# Altium PCB DDC112_TestBoard_v26.1b.PcbDoc (part 1 of 2)
Units mm, origin at the board's own origin, x right, y up, seen from the top; angles counter-clockwise.
Board outline 74 x 56 mm, 4 copper layers (Top Layer, Layer 1, Layer 2, Bottom Layer), stack 1.675 mm thick; 66 components, 60 nets, 244 pads, 541 vias.
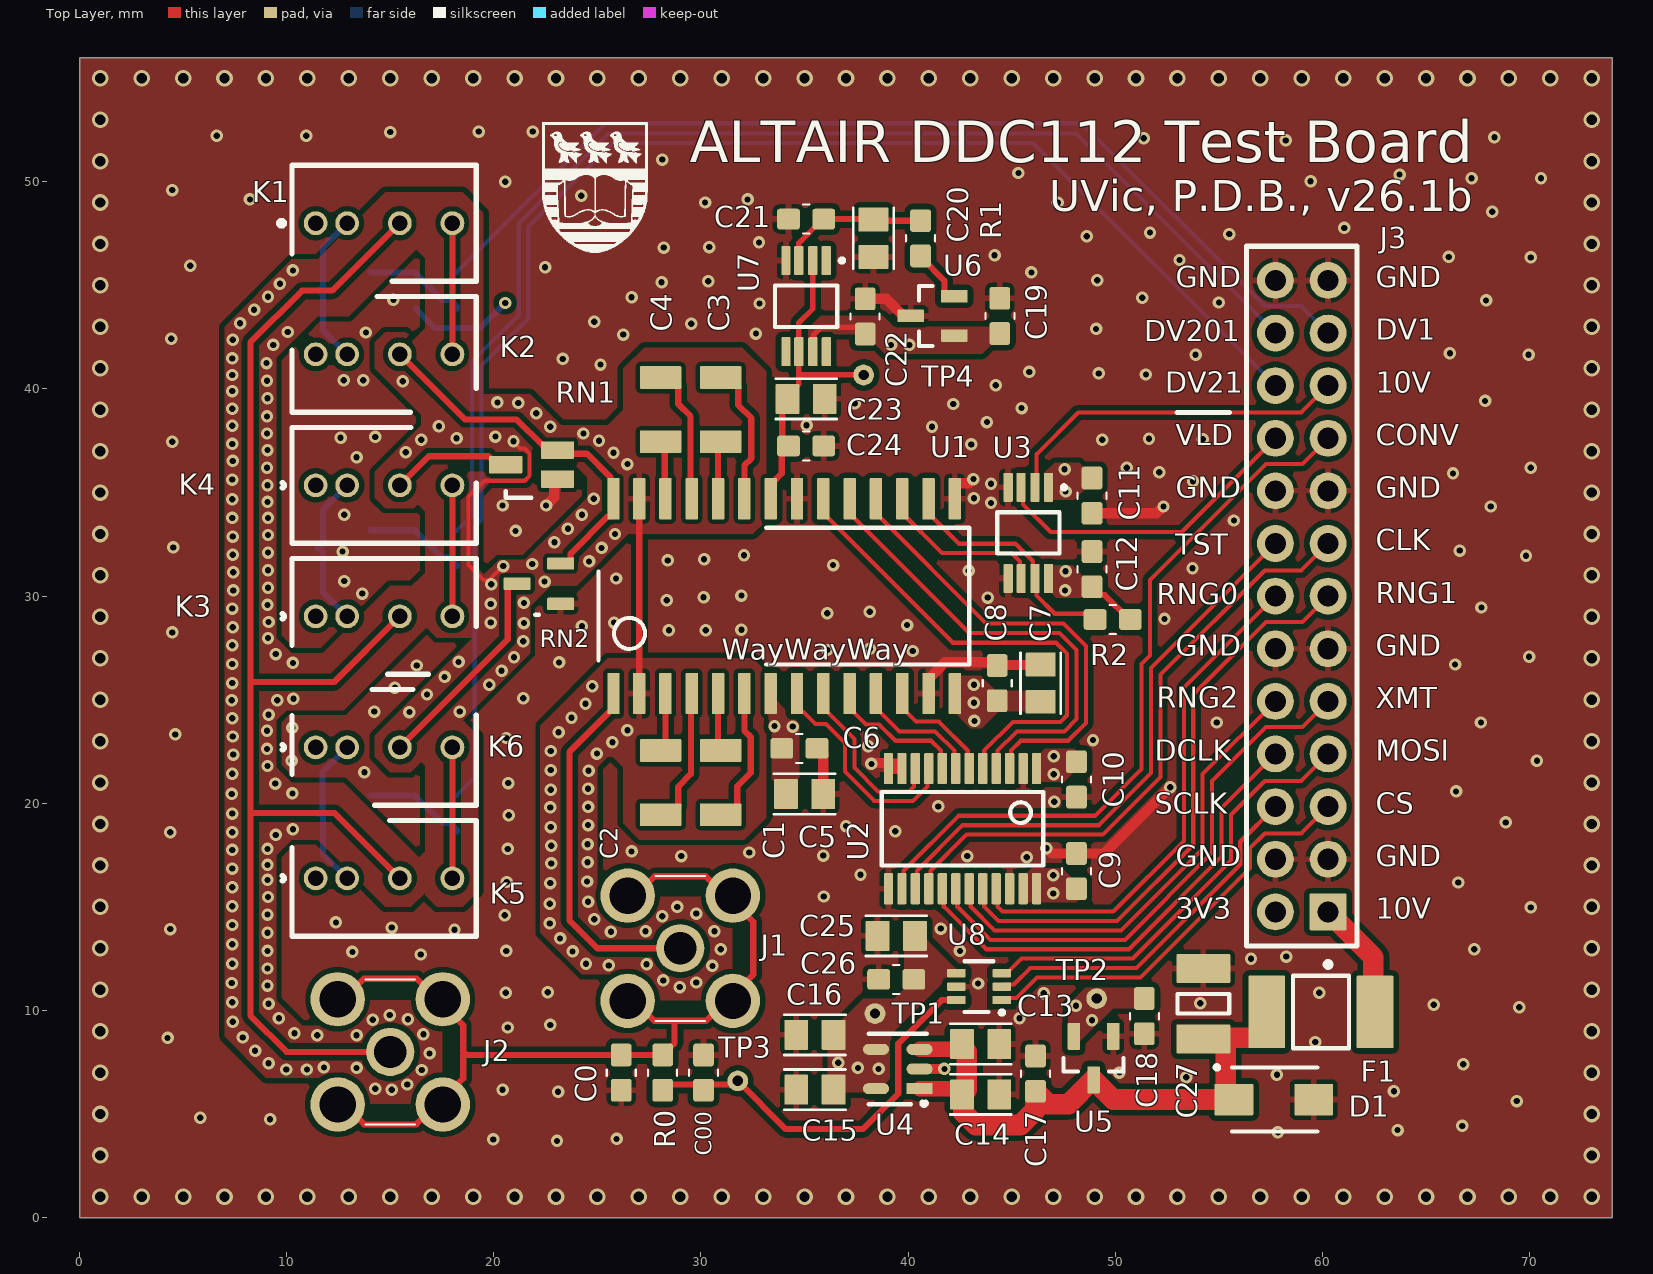
[diagram p0: Top Layer view]
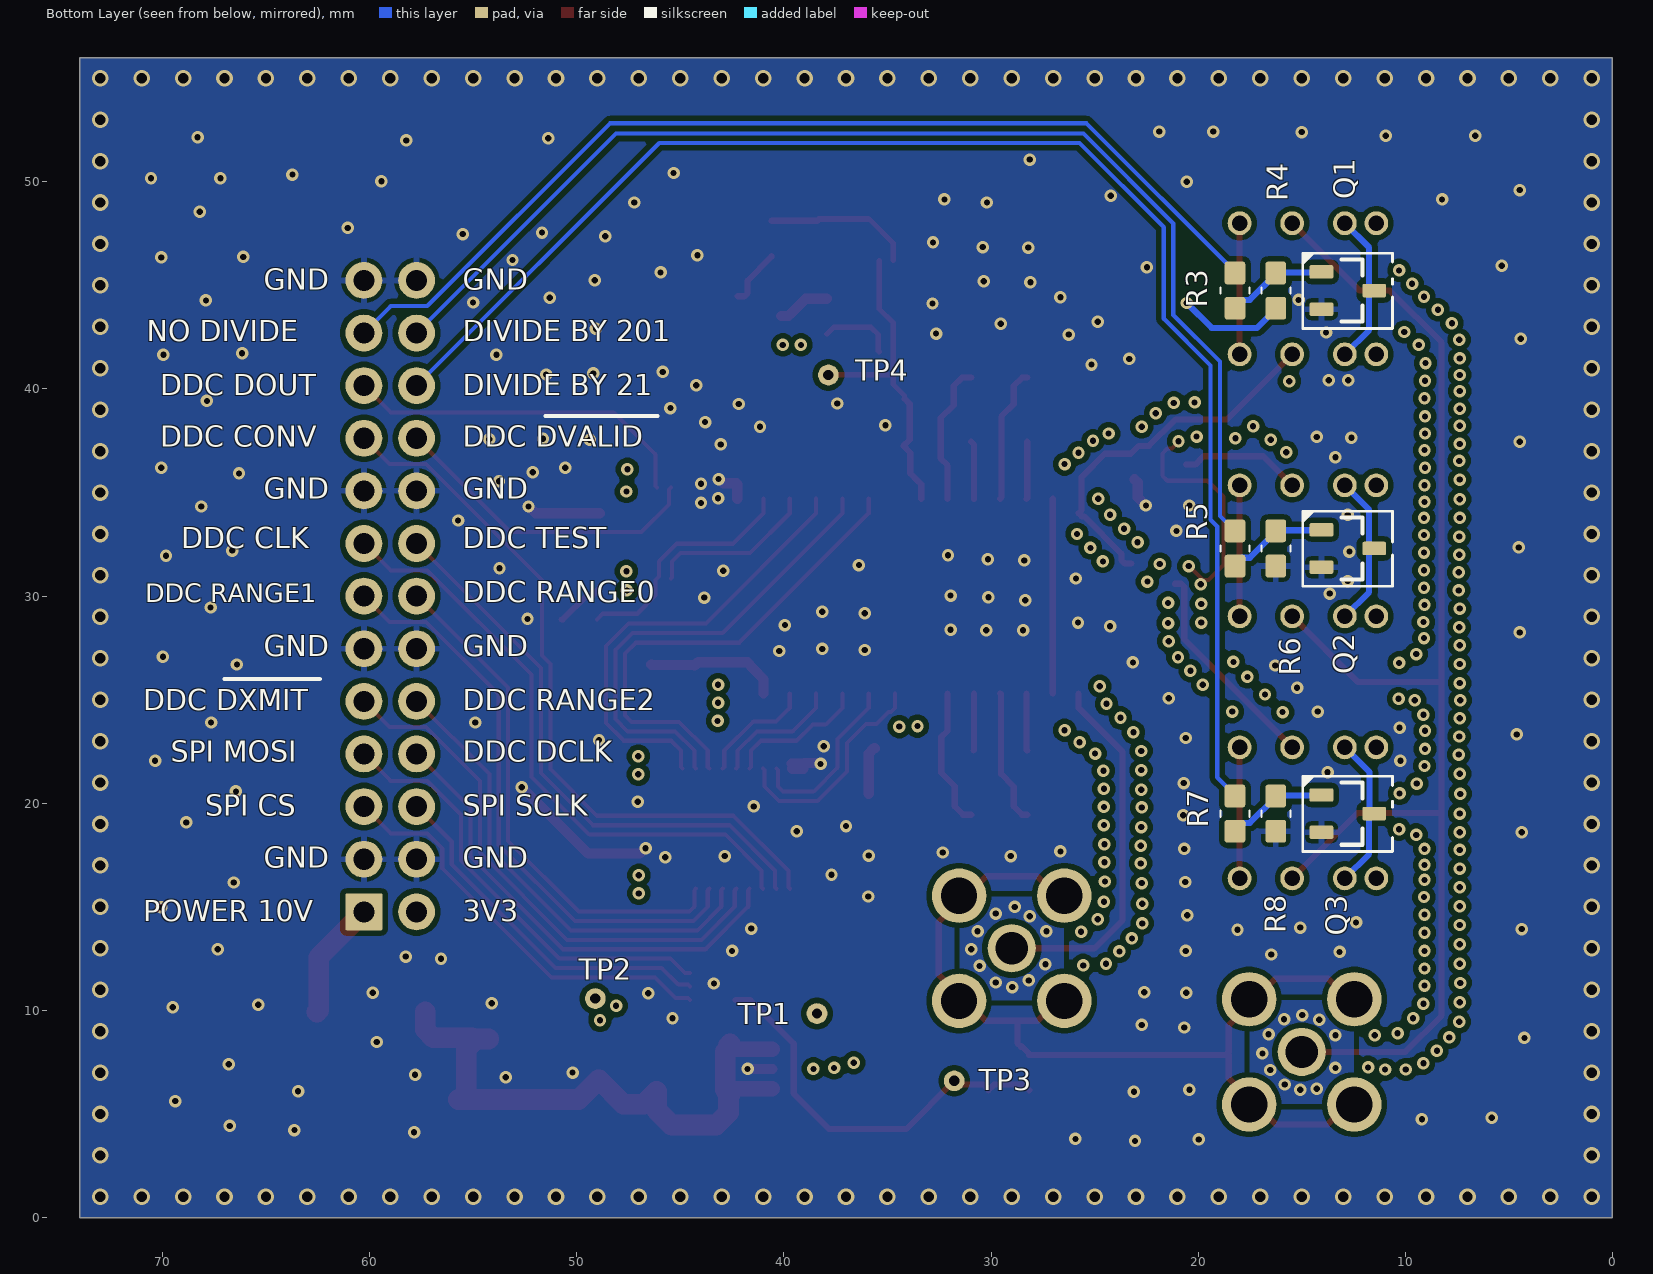
[diagram p1: Bottom Layer view, seen from below]
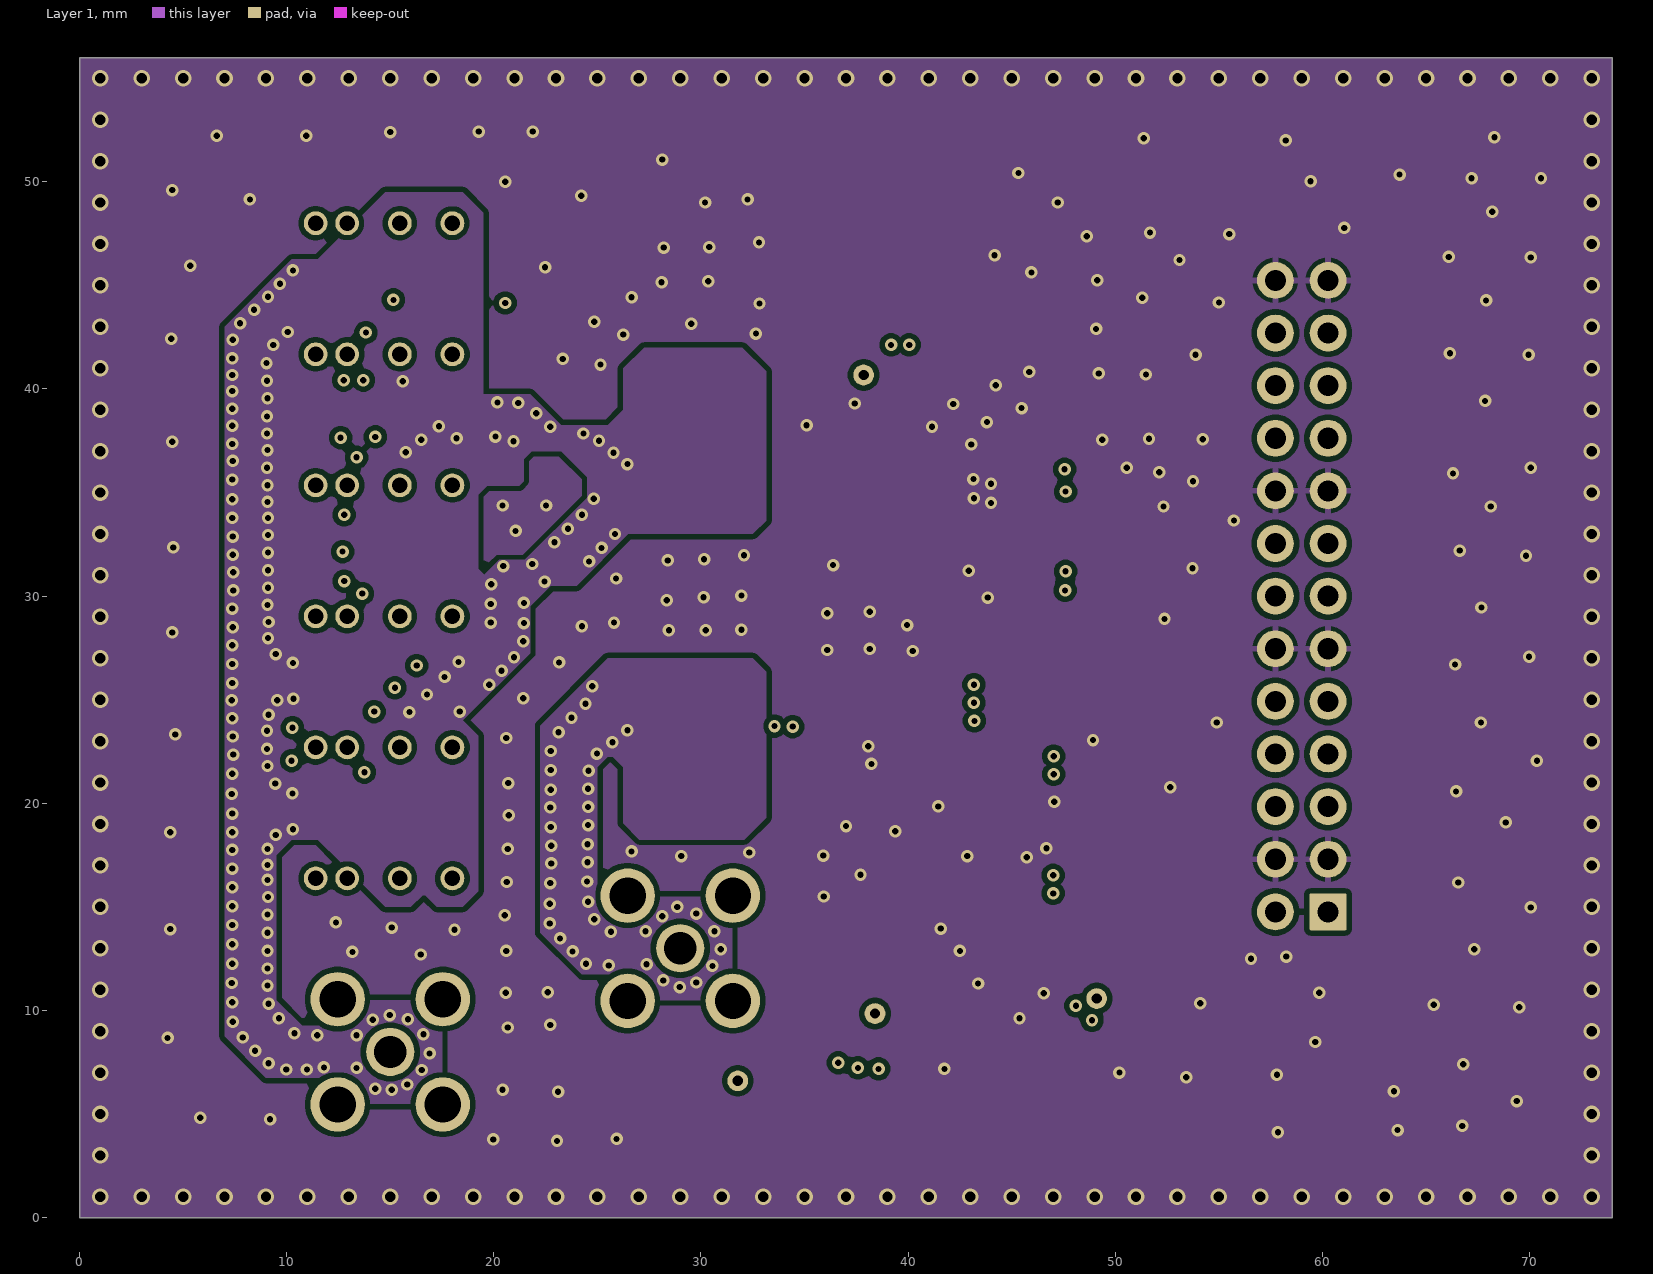
[diagram p2: Layer 1]
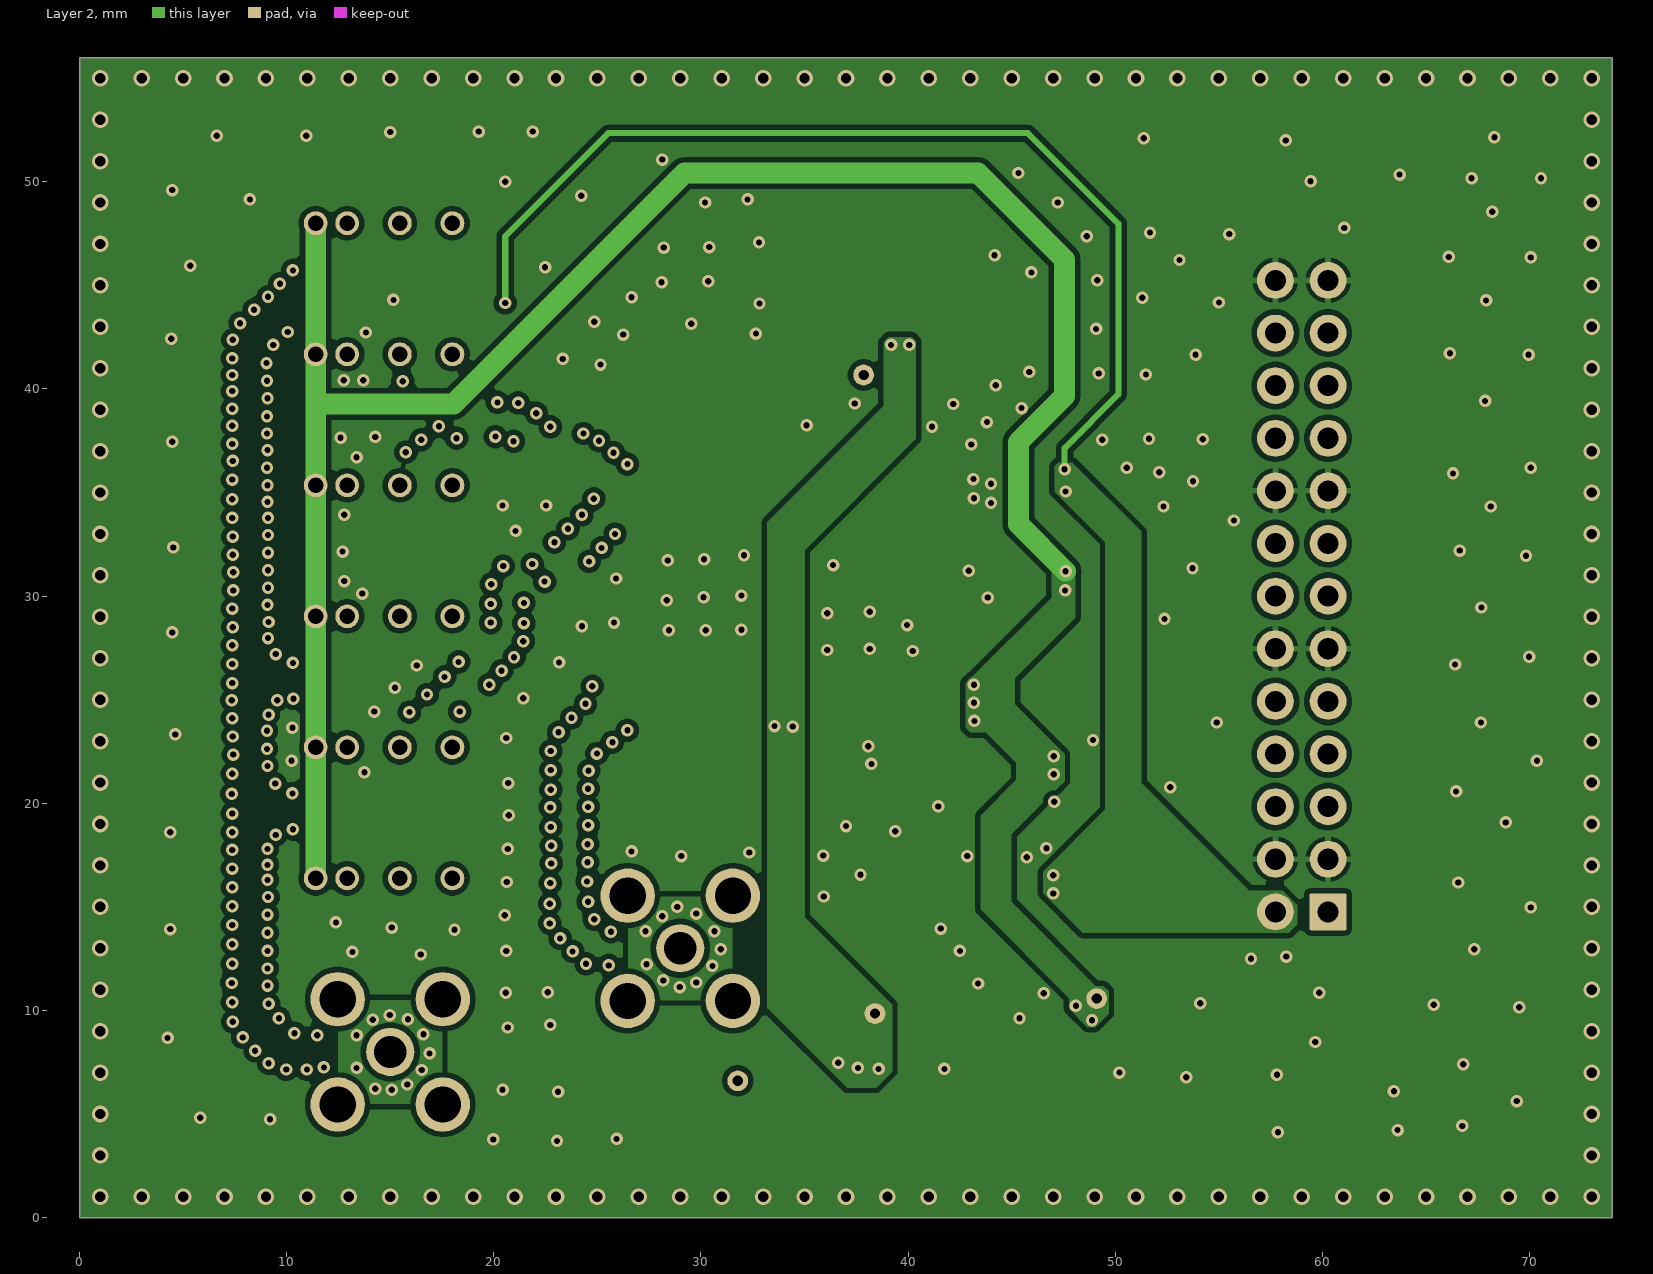
[diagram p3: Layer 2]
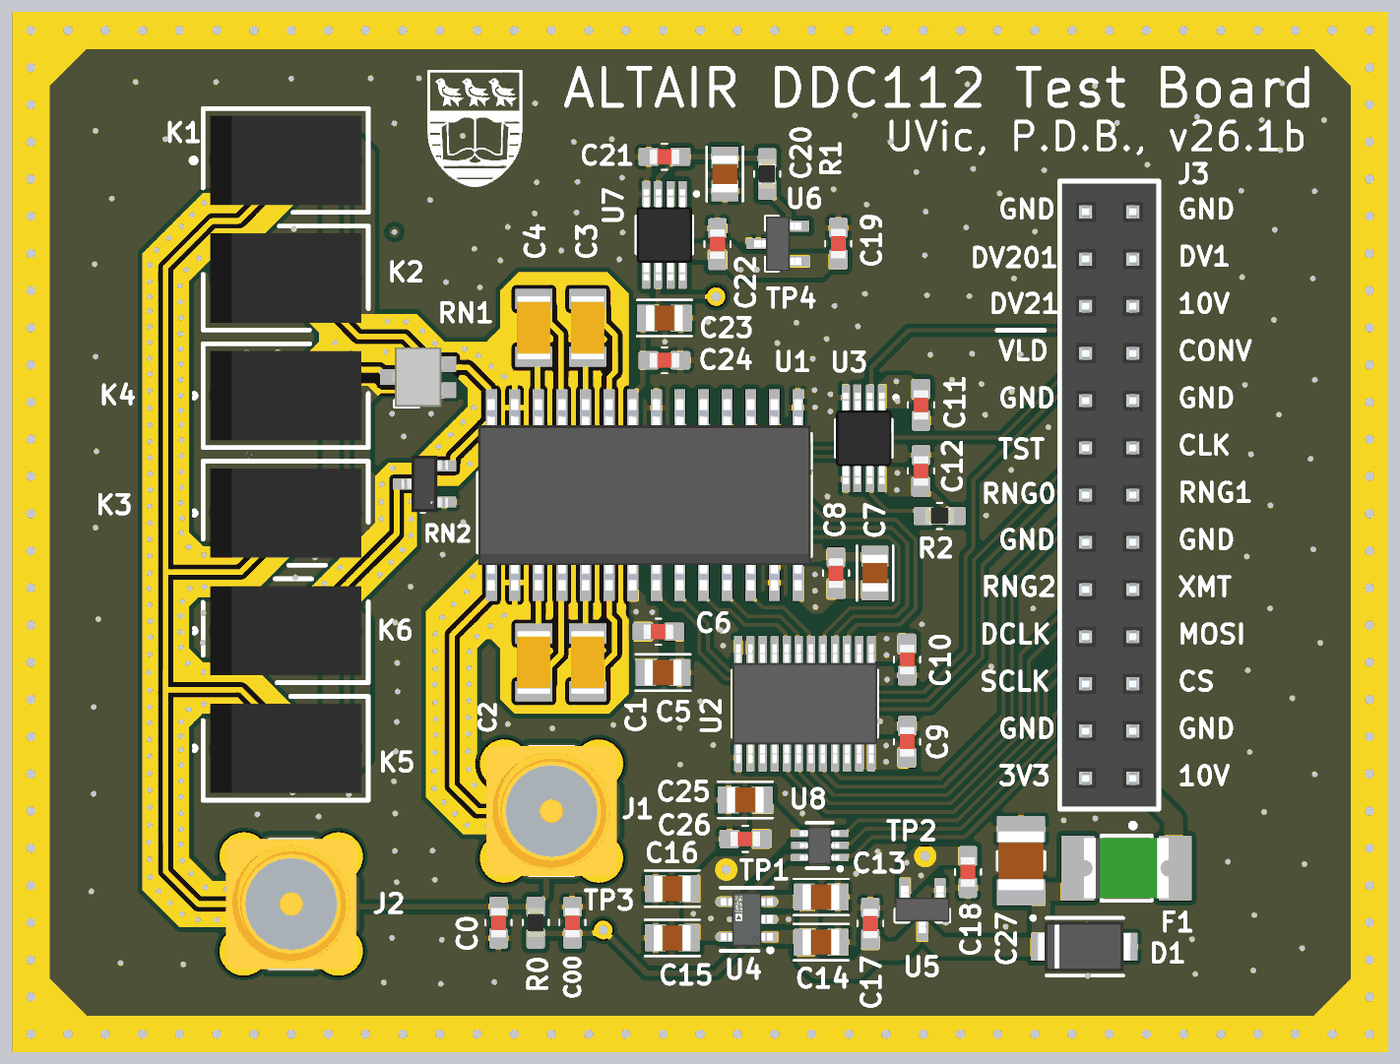
[diagram p4: 3D render of the assembled board from above, using the file's embedded part models]
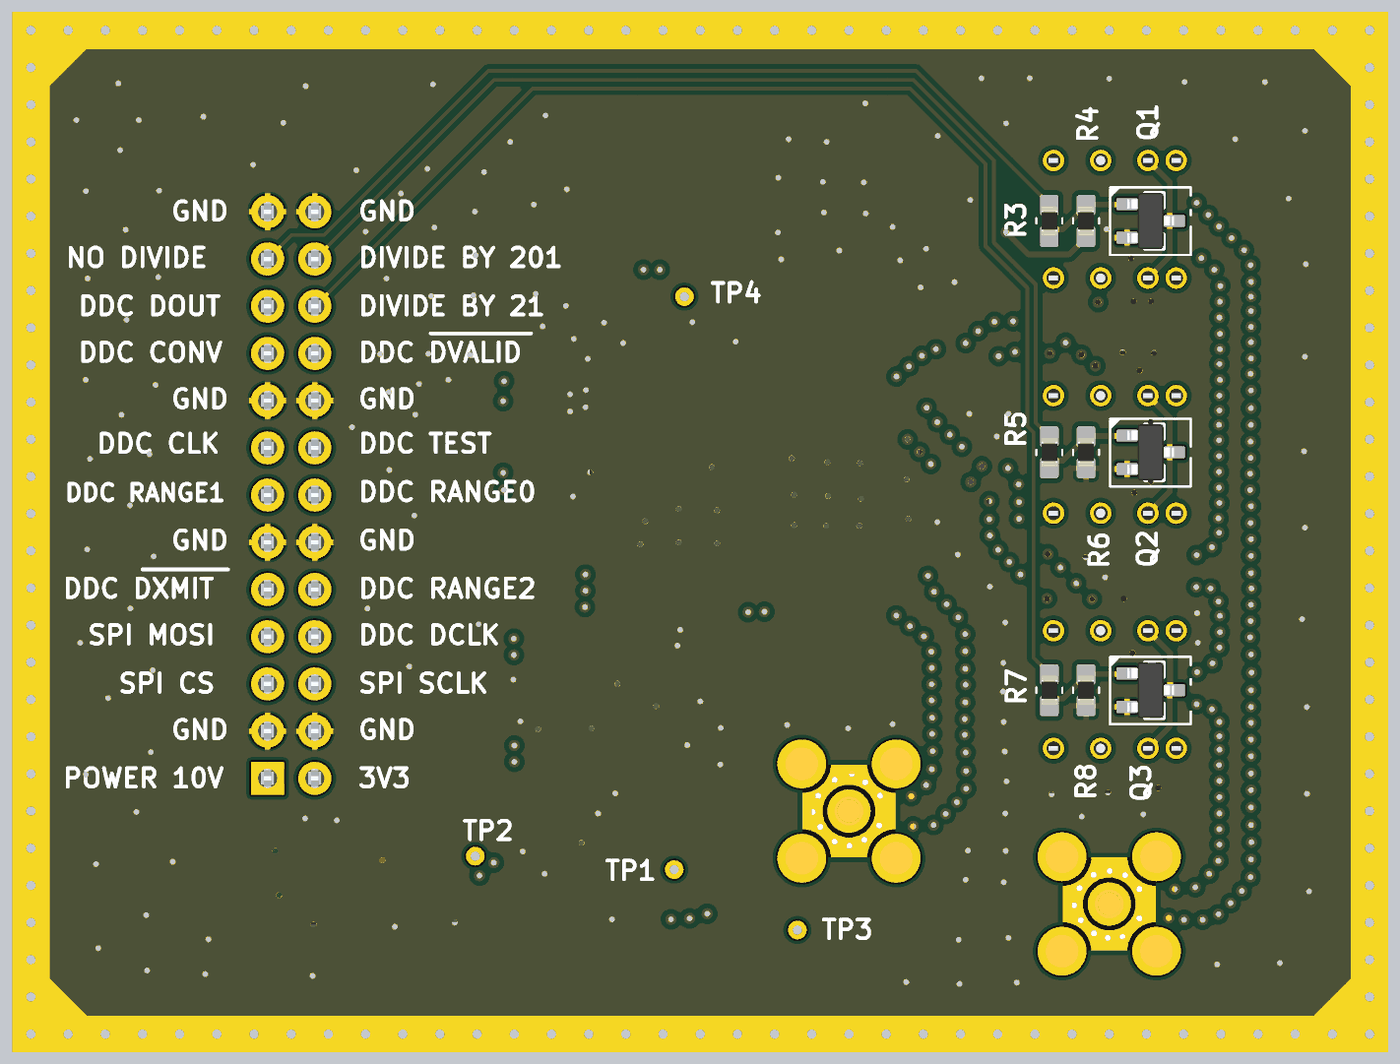
[diagram p5: 3D render of the assembled board from below, using the file's embedded part models]

## Layer stack, top to bottom
Top Solder: solder mask 0.0254, Solder Resist, Dk 3.5
Top Layer: signal copper 0.0356
Dielectric 2: prepreg 0.1702, FR-408, Dk 4.1
Layer 1: signal copper 0.035
Dielectric 1: core 1.1938, FR-408, Dk 4.8
Layer 2: signal copper 0.035
Dielectric 3: prepreg 0.1702, FR-408, Dk 4.1
Bottom Layer: signal copper 0.0356
Bottom Solder: solder mask 0.0254, Solder Resist, Dk 3.5

## Board outline
0,0 74,0 74,56 0,56

## Design rules (kind name [scope] priority, off if disabled: settings)
AssemblyTestPointUsage [All] p1: isadvanced=TRUE
AssemblyTestpoint [All] p1: isadvanced=TRUE testpointundercomponent=TRUE minsize=1.016 maxsize=2.54 preferedsize=1.524 minholesize=0 maxholesize=1.016 preferedholesize=0.813 testpointgrid=0.025 usegrid=TRUE gridtolerance=0 allowsidetop=TRUE allowsidebottom=TRUE
Clearance Clearance_GuardPoly [InPolygonClass('GuardPoly')] p1: isadvanced=TRUE gap=0.25 ignorepadtopadclearanceinfootprint=FALSE except(0: Arc-Hole Track-Hole SMDPad-Hole THPad-Hole Via-Hole Fill-Hole Poly-Hole Region-Hole Text-Hole Hole-Hole; 0.2: SMDPad-Fill SMDPad-Poly SMDPad-Region; 0.254: Arc-Arc Arc-Track Arc-SMDPad Arc-THPad Arc-Via Arc-Text Track-Track Track-SMDPad Track-THPad Track-Via Track-Text SMDPad-SMDPad SMDPad-THPad SMDPad-Via SMDPad-Text THPad-THPad THPad-Via THPad-Text Via-Via Via-Text Text-Text)
Clearance Clearance_NoViaInPad [IsVia vs IsVia or IsPad] p2: isadvanced=TRUE gap=0.254 ignorepadtopadclearanceinfootprint=FALSE except(0: Arc-Hole Track-Hole SMDPad-Hole THPad-Hole Via-Via Via-Hole Fill-Hole Poly-Hole Region-Hole Text-Hole Hole-Hole)
Clearance Clearance_DifferentNets [All] p3: isadvanced=TRUE gap=0.254 ignorepadtopadclearanceinfootprint=TRUE except(0: Arc-Hole Track-Hole SMDPad-Hole THPad-Hole Via-Hole Fill-Hole Poly-Hole Region-Hole Text-Hole Hole-Hole)
Clearance Clearance_1 [(ExistsOnLayer('Layer 1') Or ExistsOnLayer('Layer 2')) vs (ExistsOnLayer('Layer 1') Or ExistsOnLayer('Layer 2'))] p4: gap=0.254 ignorepadtopadclearanceinfootprint=FALSE sourcerule=49 cellrowname=All cellrowtype=0 cellcolname=All cellcoltype=0 innerlayers=TRUE
Clearance Clearance_2 [(ExistsOnLayer('Top Layer') Or ExistsOnLayer('Bottom Layer')) vs (ExistsOnLayer('Top Layer') Or ExistsOnLayer('Bottom Layer'))] p5: gap=0.254 ignorepadtopadclearanceinfootprint=FALSE sourcerule=49 cellrowname=All cellrowtype=0 cellcolname=All cellcoltype=0 outerlayers=TRUE
Clearance [All] p6: gap=0.254 ignorepadtopadclearanceinfootprint=FALSE ismatrix=TRUE
ComponentClearance [All] p1: isadvanced=TRUE gap=0.254 collisioncheckmode=3 verticalgap=0.254 showdistances=FALSE
FabricationTestPointUsage [All] p1: isadvanced=TRUE valid=0 allowmultiple=FALSE
FabricationTestpoint [All] p1: isadvanced=TRUE side=3 testpointundercomponent=TRUE minsize=1.016 maxsize=2.54 preferedsize=1.524 minholesize=0 maxholesize=1.016 preferedholesize=0.813 testpointgrid=0.025 allowsidetop=TRUE allowsidebottom=TRUE usegrid=TRUE gridtolerance=0
FanoutControl Fanout_BGA [IsBGA] p1: isadvanced=TRUE bgadir=Out bgaviamode=Centered fanoutstyle=Auto fanoutdirection=Alternating viagrid=0.025 // Fanout_BGA (Default Rule)
FanoutControl Fanout_LCC [IsLCC] p2: isadvanced=TRUE bgadir=Out bgaviamode=Centered fanoutstyle=Auto fanoutdirection=Alternating viagrid=0.025 // Fanout_LCC (Default Rule)
FanoutControl Fanout_SOIC [IsSOIC] p3: isadvanced=TRUE bgadir=Out bgaviamode=Centered fanoutstyle=Auto fanoutdirection=Alternating viagrid=0.025 // Fanout_SOIC (Default Rule)
FanoutControl Fanout_Small [(CompPinCount < 5)] p4: isadvanced=TRUE bgadir=Out bgaviamode=Centered fanoutstyle=Auto fanoutdirection=OutThenIn viagrid=0.025 // Fanout_Small (Default Rule)
FanoutControl Fanout_Default [All] p5: isadvanced=TRUE bgadir=Out bgaviamode=Centered fanoutstyle=Auto fanoutdirection=Alternating viagrid=0.025 // Fanout_Default (Default Rule)
Height [All] p1: isadvanced=TRUE minheight=0 maxheight=25.4 prefheight=12.7
HoleSize [All] p1: isadvanced=TRUE absolutevalues=TRUE maxlimit=4 minlimit=0.2 maxpercent=80.000 minpercent=20.000
HoleToHoleClearance [All] p1: isadvanced=TRUE gap=0.407 allowstackedmicrovias=TRUE
LayerPairs [All] p1: isadvanced=TRUE enforce=TRUE
MinimumSolderMaskSliver [All] p1: isadvanced=TRUE minsoldermaskwidth=0.076
NetAntennae [All] p1: isadvanced=TRUE netantennaetolerance=0
PasteMaskExpansion [All] p1: isadvanced=TRUE expansion=0
PlaneClearance [All] p1: isadvanced=TRUE clearance=0.508
PlaneConnect [All] p1: isadvanced=TRUE planeconnectstyle=Relief reliefexpansion=0.508 reliefentries=4 reliefconductorwidth=0.254 reliefairgap=0.254
PolygonConnect DirectConnectViasRule [InPolygonClass('DirectConnectVias')] p1: isadvanced=TRUE thpad.connectstyle=Relief thpad.reliefconductorwidth=0.3 thpad.reliefentries=4 thpad.polygonreliefangle="90 Angle" thpad.airgapwidth=0.2 smdpad.connectstyle=Relief smdpad.reliefconductorwidth=0.3 smdpad.reliefentries=4 smdpad.polygonreliefangle="90 Angle" smdpad.airgapwidth=0.2 via.connectstyle=Direct via.reliefconductorwidth=0.254 via.reliefentries=2 via.polygonreliefangle="0 Angle" via.airgapwidth=0.254
PolygonConnect DirectConnectAllRule [InPolygonClass('DirectConnectAll')] p2: isadvanced=TRUE connectstyle=Direct reliefconductorwidth=0.254 reliefentries=2 polygonreliefangle="0 Angle" airgapwidth=0.254
PolygonConnect [All] p3: connectstyle=Relief reliefconductorwidth=0.254 reliefentries=4 polygonreliefangle="90 Angle" airgapwidth=0.254
RoutingCorners [All] p1: isadvanced=TRUE cornerstyle=45-Degree minsetback=2.54 maxsetback=2.54
RoutingPriority [All] p1: isadvanced=TRUE routingpriority=0
RoutingVias RoutingViaStyle_1 [All] p1: isadvanced=TRUE holewidth=0.3 width=0.6 viastyle="Through Hole" minholewidth=0.2 minwidth=0.5 maxholewidth=2 maxwidth=1
RoutingVias [All] p2: holewidth=0.711 width=1.27 viastyle="Through Hole" minholewidth=0.711 minwidth=1.27 maxholewidth=0.711 maxwidth=1.27
ShortCircuit [All] p1: isadvanced=TRUE allowed=FALSE
SilkToSilkClearance [All] p1: isadvanced=TRUE silktosilkclearance=0.254
SilkToSolderMaskClearance [IsPad or IsPoly] p1: isadvanced=TRUE minsilkscreentomaskgap=0.15 clearancetoexposedcopper=TRUE
SolderMaskExpansion [All] p1: isadvanced=TRUE expansion=0.102 istentingtop=FALSE
SupplyNets "Schematic Supply Nets_5" [InNet('3V3')] p1: isadvanced=TRUE voltage=0.000
SupplyNets "Schematic Supply Nets_4" [InNet('GND')] p2: isadvanced=TRUE voltage=0.000
SupplyNets "Schematic Supply Nets_3" [InNet('A5V')] p3: isadvanced=TRUE voltage=0.000
SupplyNets "Schematic Supply Nets_2" [InNet('D5V')] p4: isadvanced=TRUE voltage=0.000
SupplyNets "Schematic Supply Nets_1" [InNet('BIAS')] p5: isadvanced=TRUE voltage=0.000
SupplyNets "Schematic Supply Nets" [InNet('VIN')] p6: isadvanced=TRUE voltage=0.000
UnRoutedNet [All] p1: isadvanced=TRUE
UnpouredPolygon [All] p1: isadvanced=TRUE
Width MaxMinWidth_1 [All] p1: isadvanced=TRUE maxlimit=2 minlimit=0.2 preferedwidth=0.3 midlayer1_minwidth=0.254 midlayer2_minwidth=0.254 minimp=50.000000 maximp=50.000000 favimp=50.000000
Width [All] p2: maxlimit=0.254 minlimit=0.254 preferedwidth=0.254
4 further rules are at their usual default settings.

## Classes and differential pairs
polygon class GuardPoly: GUARD_L01_P01 GUARD_L01_P02 GUARD_L01_P03 GUARD_L01_P04 GUARD_L01_P05 GUARD_L01_P06
polygon class DirectConnectVias: GND_L01_P01 GND_L02_P01 GND_L03_P01 GND_L04_P01 GUARD_L01_P01 GUARD_L01_P02 GUARD_L01_P03 GUARD_L01_P04 GUARD_L01_P05 GUARD_L01_P06 GUARD_L02_P01 GUARD_L02_P02 GUARD_L02_P03 GUARD_L02_P04 GUARD_L02_P05 GUARD_L03_P01 GUARD_L03_P02 GUARD_L04_P01 GUARD_L04_P02
polygon class DirectConnectAll: 3V3_L01_P01 3V3_L01_P002 3V3_L03_P01 A5V_L01_P01 A5V_L01_P02 A5V_L01_P03 A5V_L03_P01 D5V_L01_P01 D5V_L01_P02 D5V_L01_P03 D5V_L01_P04 D5V_L03_P01

## Components (designator, comment, footprint, x,y, rotation, side; value= is the part's Value field where it differs from the comment)
C00 "TBD OPT" "CAP 0603 IPC MID DENSITY" 30.125,7 r90 top
C0 "TBD OPT" "CAP 0603 IPC MID DENSITY" 26.15,7 r270 top
C1 "270pF" "CAP 1206 NON-IPC CUSTOM" 30.95,21 r270 top
C2 "270pF" "CAP 1206 NON-IPC CUSTOM" 28.05,21 r90 top
C3 "270pF" "CAP 1206 NON-IPC CUSTOM" 30.95,39 r90 top
C4 "270pF" "CAP 1206 NON-IPC CUSTOM" 28.05,39 r270 top
C5 "10uF" "CAP 0805 IPC MID DENSITY" 35,20.45 r0 top
C6 "0.1uF" "CAP 0603 IPC MID DENSITY" 34.75,22.65 r0 top
C7 "10uF" "CAP 0805 IPC MID DENSITY" 46.4,25.8 r90 top
C8 "0.1uF" "CAP 0603 IPC MID DENSITY" 44.3,25.8 r90 top
C9 "0.1uF" "CAP 0603 IPC MID DENSITY" 48.125,16.725 r90 top
C10 "0.1uF" "CAP 0603 IPC MID DENSITY" 48.125,21.15 r270 top
C11 "0.1uF" "CAP 0603 IPC MID DENSITY" 48.875,34.85 r270 top
C12 "0.1uF" "CAP 0603 IPC MID DENSITY" 48.875,31.3 r90 top
C13 "1uF" "CAP 0805 IPC MID DENSITY" 43.5,8.375 r0 top
C14 "1uF" "CAP 0805 IPC MID DENSITY" 43.5,5.95 r0 top
C15 "1uF" "CAP 0805 IPC MID DENSITY" 35.5,6.175 r180 top
C16 "1uF" "CAP 0805 IPC MID DENSITY" 35.5,8.825 r180 top
C17 "0.1uF" "CAP 0603 IPC MID DENSITY" 46.15,6.95 r90 top
C18 "0.47uF" "CAP 0603 IPC MID DENSITY" 51.4,9.725 r270 top
C19 "0.47uF" "CAP 0603 IPC MID DENSITY" 44.425,43.525 r90 top
C20 "10uF" "CAP 0805 IPC MID DENSITY" 38.325,47.275 r270 top
C21 "0.1uF" "CAP 0603 IPC MID DENSITY" 35.075,48.2 r180 top
C22 "0.1uF" "CAP 0603 IPC MID DENSITY" 37.925,43.5 r270 top
C23 "10uF" "CAP 0805 IPC MID DENSITY" 35.075,39.525 r0 top
C24 "0.1uF" "CAP 0603 IPC MID DENSITY" 35.075,37.25 r0 top
C25 "10uF" "CAP 0805 IPC MID DENSITY" 39.425,13.6 r180 top
C26 "0.1uF" "CAP 0603 IPC MID DENSITY" 39.425,11.5 r180 top
C27 "22uF" "CAP 1210 NON-IPC MURATA" 54.25,10.325 r90 top
D1 "SMAJ12A" "DO-214AC SMA VISHAY" 57.65,5.7 r0 top
F1 "0ZCG0014FF2C" "POLYFUSE 1812 NON-IPC BELFUSE" 59.925,9.925 r0 top
J1 "60312002114503" "COAX SMA THT" 29,13 r0 top locked
J2 "60312002114503" "COAX SMA THT" 15,8 r0 top
J3 "61302621821" 61302621821 59,30 r90 top locked
K1 "118-A-5/2D" 118-A-5/2D 11.4,48 r0 top
K2 "118-A-5/2D" 118-A-5/2D 11.4,41.675 r0 top
K3 "118-A-5/2D" 118-A-5/2D 11.4,29.025 r0 top
K4 "118-A-5/2D" 118-A-5/2D 11.4,35.35 r0 top
K5 "118-A-5/2D" 118-A-5/2D 11.4,16.375 r0 top
K6 "118-A-5/2D" 118-A-5/2D 11.4,22.7 r0 top
Q1 "DMG2302UK" "SOT90-3 LOW DENSITY" 12.775,44.75 r180 bottom
Q2 "DMG2302UK" "SOT90-3 LOW DENSITY" 12.775,32.3 r180 bottom
Q3 "DMG2302UK" "SOT90-3 LOW DENSITY" 12.775,19.5 r180 bottom
R0 "TBD" "RES 0603 IPC MID DENSITY" 28.15,7 r270 top
R1 "10k" "RES 0603 IPC MID DENSITY" 40.6,47.275 r270 top
R2 "10k" "RES 0603 IPC MID DENSITY" 49.875,28.875 r0 top
R3 "47R" "RES 0603 IPC MID DENSITY" 18.225,44.75 r90 bottom
R4 "100k" "RES 0603 IPC MID DENSITY" 16.25,44.75 r270 bottom
R5 "47R" "RES 0603 IPC MID DENSITY" 18.225,32.3 r90 bottom
R6 "100k" "RES 0603 IPC MID DENSITY" 16.25,32.3 r90 bottom
R7 "47R" "RES 0603 IPC MID DENSITY" 18.225,19.5 r90 bottom
R8 "100k" "RES 0603 IPC MID DENSITY" 16.25,19.5 r90 bottom
RN1 "MU100R0/20K00BA" "RES NETWORK MOLDED J-LEAD VPG" 21.825,36.35 r180 top
RN2 "MPMT10012002" "SOT23-3 MID DENSITY VISHAY" 22.175,30.6 r180 top
TP1 "Testpoint" "TESTPOINT THT" 38.4,9.85 r90 top
TP2 "Testpoint" "TESTPOINT THT" 49.1,10.575 r90 top
TP3 "Testpoint" "TESTPOINT THT" 31.775,6.6 r90 top
TP4 "Testpoint" "TESTPOINT THT" 37.85,40.675 r90 top
U1 "DDC112U" "28SOIC LOW DENSITY TI" 34,30 r90 top locked
U2 "SN74LVC4245A" "24TSSOP LOW DENSITY TI" 42.625,18.775 r270 top
U3 "SN74LVC2T45" "8VSSOP LOW DENSITY TI" 45.8,33.05 r270 top
U4 "ADP7142AUJZ-5.0-R7" "SOT23-5 HIGH DENSITY AD" 39.5,7.175 r180 top
U5 "TLV70950DBZR" "SOT23-3 MID DENSITY TI" 48.95,7.7 r270 top
U6 "REF3040E" "SOT23-3 MID DENSITY TI" 41.175,43.525 r180 top
U7 "OPA350" "8VSSOP LOW DENSITY TI" 35.075,44 r270 top
U8 "DAC5311" "SOT363-6 MID DENSITY TI" 43.425,11.15 r180 top

## Footprints (in the part's own frame and the unit in brackets; to place one, negate y for a bottom-side part, rotate by r counter-clockwise, add the part's x,y. Pads: shape width x height; smd on the part's side, far side on the other; paste and mask are expansions set on the pad)
"8VSSOP LOW DENSITY TI" [mm]
  rrect22% 1.4x0.45 smd mask+0.025: 1(-2.2,0.975) 2(-2.2,0.325) 3(-2.2,-0.35) 4(-2.2,-0.975) 5(2.2,-0.975) 6(2.2,-0.35) 7(2.2,0.325) 8(2.2,0.975)
  silkscreen extent -2.27,-1.5 1,1.8, body extent -2.45,-1.5 2.45,1.5, height 1.1
"24TSSOP LOW DENSITY TI" [mm] "Reference document: PW0024A"
  rrect22% 1.5x0.45 smd mask+0.025: 1(-2.9,3.575) 2(-2.9,2.925) 3(-2.9,2.275) 4(-2.9,1.625) 5(-2.9,0.975) 6(-2.9,0.325) 7(-2.9,-0.325) 8(-2.9,-0.975) 9(-2.9,-1.625) 10(-2.9,-2.275) 11(-2.9,-2.925) 12(-2.9,-3.575) 13(2.9,-3.575) 14(2.9,-2.925) 15(2.9,-2.275) 16(2.9,-1.625) 17(2.9,-0.975) 18(2.9,-0.325) 19(2.9,0.325) 20(2.9,0.975) 21(2.9,1.625) 22(2.9,2.275) 23(2.9,2.925) 24(2.9,3.575)
  silkscreen extent -1.78,-3.9 1.78,3.9, body extent -3.2,-3.9 3.2,3.9, height 1.13
"28SOIC LOW DENSITY TI" [mm] "Reference document: R-PDSO-G28"
  rrect16% 2x0.6 smd mask+0.035: 1(-4.7,8.225) 2(-4.7,6.985) 3(-4.7,5.715) 4(-4.7,4.445) 5(-4.7,3.175) 6(-4.7,1.905) 7(-4.7,0.635) 8(-4.7,-0.635) 9(-4.7,-1.905) 10(-4.7,-3.175) 11(-4.7,-4.445) 12(-4.7,-5.715) 13(-4.7,-6.985) 14(-4.7,-8.255) 15(4.7,-8.255) 16(4.7,-6.985) 17(4.7,-5.715) 18(4.7,-4.445) 19(4.7,-3.175) 20(4.7,-1.905) 21(4.7,-0.635) 22(4.7,0.635) 23(4.7,1.905) 24(4.7,3.175) 25(4.7,4.445) 26(4.7,5.715) 27(4.7,6.985) 28(4.7,8.225)
  silkscreen extent -3.3,-8.95 3.3,8.95, body extent -5.15,-8.95 5.15,8.95, height 2.65
118-A-5/2D [mm]
  round 1.15 hole 0.75 mask+0.05: 1(0,0) 2(1.52,0) 3(4.06,0) 4(6.6,0)
  silkscreen extent -1.78,-2.79 7.75,2.79, body extent -0.76,-2.4 7.37,2.4, height 15.24
61302621821 [mil] "Wurth Elektronik 26-Position Dual Socket Header 0.1in Pitch THT"
  rrect5% 70x70 hole 40.16 mask+4.02: 1(-600,-50)
  round 70 hole 40.16 mask+4.02: 2(-600,50) 3(-500,-50) 4(-500,50) 5(-400,-50) 6(-400,50) 7(-300,-50) 8(-300,50) 9(-200,-50) 10(-200,50) 11(-100,-50) 12(-100,50) 13(0,-50) 14(0,50) 15(100,-50) 16(100,50) 17(200,-50) 18(200,50) 19(300,-50) 20(300,50) 21(400,-50) 22(400,50) 23(500,-50) 24(500,50) 25(600,-50) 26(600,50)
  silkscreen extent -705,-105 665,105, body extent -660,-100 660,100, height 335
"CAP 0603 IPC MID DENSITY" [mm]
  rrect25% 1.1x1 smd mask+0.035: 1(-0.85,0) 2(0.85,0)
  silkscreen extent -0.15,-0.7 0.15,0.7, body extent -0.8,-0.4 0.8,0.4, height 0.3
"CAP 0805 IPC MID DENSITY" [mm]
  rrect8% 1.15x1.45 smd paste+0 mask+0.035: 1(-0.9,0) 2(0.9,0)
  silkscreen extent -1.48,-0.97 1.48,0.97, body extent -1,-0.7 1,0.7, height 1.22
"CAP 1206 NON-IPC CUSTOM" [mm] "Slightly oversized pads and no silkscreen, made for a guarded region with no solder mask."
  rrect9% 1.1x2 smd mask+0.035: 1(-1.55,0) 2(1.55,0)
  body extent -1.7,-0.9 1.7,0.9, height 1.8
"CAP 1210 NON-IPC MURATA" [mm]
  rrect7% 1.4x2.6 smd mask+0.035: 1(-1.7,0) 2(1.7,0)
  silkscreen extent -0.48,-1.25 0.48,1.25, body extent -1.6,-1.25 1.6,1.25, height 2.7
"COAX SMA THT" [mm] "50Ohm, 18GHz max, female jack, Wurth Elektronik 60312002114503"
  round 2.325 hole 1.55: 1(0,0)
  round 2.625 hole 1.75: 2(-2.54,-2.54) 3(-2.54,2.54) 4(2.54,-2.54) 5(2.54,2.54)
  silkscreen extent -1.2,-3.5 1.2,3.5, body extent -3.5,-3.5 3.5,3.5, height 10.19
"DO-214AC SMA VISHAY" [mm]
  rrect6% 1.88x1.52 smd mask+0.035: 1(-1.93,0) 2(1.93,0)
  silkscreen extent -2.82,-1.55 2.1,1.62, body extent -2.55,-1.33 2.55,1.33, height 2.29
"POLYFUSE 1812 NON-IPC BELFUSE" [mm]
  rrect5% 1.78x3.5 smd mask+0.035: 1(-2.615,0) 2(2.615,0)
  silkscreen extent -1.35,-1.75 1.35,1.75, body extent -2.27,-1.62 2.27,1.62, height 0.7
"RES 0603 IPC MID DENSITY" [mm]
  rrect25% 1.1x1 smd mask+0.025: 1(-0.85,0) 2(0.85,0)
  silkscreen extent -0.15,-0.7 0.15,0.7, body extent -0.77,-0.43 0.78,0.43, height 0.44
"RES NETWORK MOLDED J-LEAD VPG" [mm] "Pin numbering is unconventional. See the VPG MU series datasheet."
  rrect11% 1.6x0.85 smd mask+0.035: 1(-1.25,0.7) 2(1.25,0) 3(-1.25,-0.7)
  silkscreen extent 0,1.28 1.25,1.6, body extent -1.35,-1.6 1.35,1.6, height 1.6
"SOT23-3 MID DENSITY TI" [mm] "Reference document: DBZ0003A"
  rrect16% 1.3x0.6 smd mask+0.035: 1(-1.05,0.95) 2(-1.05,-0.95) 3(1.05,0)
  silkscreen extent 0,-1.45 0.65,1.45, body extent -1.27,-1.46 1.27,1.46, height 1
"SOT23-3 MID DENSITY VISHAY" [mm]
  rrect16% 1.3x0.6 smd mask+0.035: 1(-1.05,0.975) 2(-1.05,-0.975) 3(1.05,0)
  silkscreen extent 0,1.5 0.17,1.5, body extent -1.24,-1.52 1.24,1.52, height 1.12
"SOT23-5 HIGH DENSITY AD" [mm] "FP-UJ-5-IPC_C"
  rect 1.254x0.532 smd paste+0 mask+0.025: 1(-1.05,0.95)
  rrect100% 1.254x0.532 smd paste+0 mask+0.025: 2(-1.05,0) 3(-1.05,-0.95) 4(1.05,-0.95) 5(1.05,0.95)
  silkscreen extent -1.4,-1.7 1.4,1.75, body extent -1.4,-1.45 1.4,1.45, height 1
"SOT90-3 LOW DENSITY" [mm] "SOT90P240X110-3M"
  rrect25% 1.15x0.65 smd: 1(-1.275,0.9) 2(-1.275,-0.9) 3(1.275,0)
  silkscreen extent -2.18,-1.83 2.16,1.8, body extent -1.25,-1.5 1.25,1.5, height 1.1
"SOT363-6 MID DENSITY TI" [mm] "Reference Document: DCK0006A"
  rect 0.9x0.4 smd paste+0 mask+0.025: 1(-1.1,0.65)
  rrect25% 0.9x0.4 smd paste+0 mask+0.025: 2(-1.1,0) 3(-1.1,-0.65) 4(1.1,-0.65) 5(1.1,0) 6(1.1,0.65)
  silkscreen extent -1.18,-1.22 0.7,1.32, body extent -1.05,-1 1.05,1, height 1
"TESTPOINT THT" [mm]
  round 1 hole 0.5: 1(0,0)

## Part data
C00 C0 C6 C8 C9 C10 C11 C12 C17 C21 C22 C24 C26: library part CAP, "Kemet C0603C104K5RACAUTO - Cap Ceramic 0.1uF 50V X7R 10% 0603 125C Paper T/R", MF=KEMET, MP=C0603C104K5RACAUTO
C1 C2 C3 C4: library part CAP, "Yageo CC1206FRNPO9BN271 - Cap Ceramic 270pF 1% C0G/NP0 50V SMD 1206", MF=YAGEO, MP=CC1206FRNPO9BN271
C5 C7 C20 C23 C25: library part CAP, "Murata GRM21BR61E106KA73L - Cap Ceramic 10uF 10% 25V X5R 0805", MF=Murata, MP=GRM21BR61E106KA73L
C13 C14 C15 C16: library part CAP, "Kemet C0805C105K3RACTU - Cap ceramic 1uF 10% X7R SMD 0805", MF=KEMET, MP=C0805C105K3RACTU
C18 C19: library part CAP, "Murata GRM188R71E474KA12D - Cap Ceramic 0.47uF 25V X7R 10% 0603 125C", MF=Murata, MP=GRM188R71E474KA12D
C27: library part CAP, "Murata GRM32ER71E226ME15K - Cap Ceramic 22uF 10% 25V X7R 1210", MF=Murata, MP=GRM32ER71E226ME15K
D1: library part Zener, "Vishay SMAJ12A-M3/61 - TVS Diode 12V Standoff 13.3V Breakdown DO-214AC", MF="Vishay General Semiconductor", MP=SMAJ12A-M3/61
F1: library part Polyfuse, "Bel Fuse 0ZCG0014FF2C - Polymeric PTC Resettable Fuse 30V 140mA hold 300mA trip SMD 1812", MF="Bel Fuse Inc.", MP=0ZCG0014FF2C
J1 J2: "Coaxial, SMA Female Jack, 50 Ohm, Through-Hole", Mouser Part Number=710-60312002114503, Datasheet Link=https://katalog.we-online.de/em/datasheet/60312002114503.pdf, Height=9.56mm, MF="Wurth Elektronik", Mouser Price/Stock=https://www.mouser.co.uk/ProductDetail/Wurth-Elektronik/60312002114503?qs=3jNSNtuqJTL%2FGpZA1FAOxw%3D%3D, MP=60312002114503
J3: "Wurth Elektronik dual socket header 26 pos 0.1in pitch THT", MF="Wurth Elektronik", MP=61302621821
K1 K2 K3 K4 K5 K6: library part "RELAY 118-A-5/2D", "High coil resistance SIL/SIP Reed Relay 118-A-5/2D", MF=Pickering, MP=118-1-A-5/2D
Q1 Q2 Q3: library part "NMOS DMG2302UK", "DIODES INC. Power MOSFET, N Channel, 20 V, 2.8 A, 0.061 ohm, SOT-23, Surface Mount", ComponentLink1Description=http://www.farnell.com/datasheets/2814387.pdf?src-supplier=Farnell, ComponentLink1URL=http://www.farnell.com/datasheets/2814387.pdf?src-supplier=Farnell, ComponentLink2Description=http://www.farnell.com/datasheets/2814387.pdf?src-supplier=Element14, ComponentLink2URL=http://www.farnell.com/datasheets/2814387.pdf?src-supplier=Element14, ComponentLink3Description=https://www.diodes.com/assets/Datasheets/DMG2302UK.pdf?src-supplier=Digi-Key, ComponentLink3URL=https://www.diodes.com/assets/Datasheets/DMG2302UK.pdf?src-supplier=Digi-Key, ComponentLink4Description=http://www.farnell.com/datasheets/2814387.pdf?src-supplier=Newark, ComponentLink4URL=http://www.farnell.com/datasheets/2814387.pdf?src-supplier=Newark, MF=Diodes, MP=DMG2302UK-7
R0: library part RES, "Vishay CRCW06030000Z0EA - Res 0 Ohms 1/8W SMD 0603", MF="Vishay Dale", MP=CRCW06030000Z0EA
R1 R2: library part RES, "Res, Any, Manually select footprint", MF="Panasonic Industry", MP=ERJ-3AEB103V
R3 R5 R7: library part RES, "Vishay CRCW060347R0JNEA - Res 47Ohm 5% 1/8W SMD 0603", MF="Vishay Dale", MP=CRCW060347R0JNEA
R4 R6 R8: library part RES, "Panasonic ERJ-3GEYJ104V - Res100k 5% 1/10W SMD 0603", MF="Panasonic Industry", MP=ERJ-3GEYJ104V
RN1: "VPG MU100R0/20K00BA - Res Divider 100R 20kR, absolute 0.1% 5ppm/C. ratop 0.05% 5ppm/C, 1210 J-lead", MF="VPG Foil Resistors", MP=MU100R0/20K00BA
RN2: "Vishay MPMT10012002 - Res Divider 1kR 20kR, absolute 0.1% 25ppm/C. ratio 0.05% 2ppm/C, SOT23-3", MF="Vishay Dale", MP=MPMT10012002AT1
U1: "Dual Current Input 20-Bit ADC 28SOIC", MF="Texas Instruments", MP=DDC112U
U2: "Octal Bus Transceiver and 3.3V to 5V Shifter with Tri-State Outputs 24TSSOP", MF="Texas Instruments", MP=SN74LVC4245APWR
U3: "Dual-Bit Dual-Supply Bus Transceiver With Configurable Voltage Translation 8VSSOP", MF="Texas Instruments", MP=SN74LVC2T45DCUR
U4: library part ADP7142AUJZ-R7, "5-40V 200mA Low Noise CMOS LDO Adjustable Linear Regulator TSOT23", Ambient Temperature Range High=+125°C, Ambient Temperature Range Low=-40°C, Dropout Voltage=200mV, Manufacturer="Analog Devices", Max Junction Temp=+150°C, Max Supply Voltage=40V, Min Supply Voltage=2.7V, Nominal Supply Current=50-180uA, Output Current=200mA, Output Voltage=1.2-5V, Package=UJ-5, Temperature="-40°C to +125°C", Accuracy Percentage=0.8%, Automotive=No, Category=IC, ComponentLink2Description=Datasheet, ComponentLink2URL=https://www.analog.com/media/en/technical-documentation/data-sheets/ADP7142.pdf, Device Class L1="Integrated Circuits (ICs)", Device Class L2="Power Management ICs", Device Class L3="Voltage Regulators - Linear", Digikey Description="IC REG LIN POS ADJ 200MA TSOT23", Height=1mm, Lead Free=Yes, Manufacturer Part Number=ADP7142AUJZ-R7, MF="Analog Devices", Mouser Description="LDO Regulator Pos 1.5V to 5V 0.2A 5-Pin TSOT-23 T/R", MP=ADP7142AUJZ-5.0-R7, Number of Outputs=1, Octopart=https://octopart.com/adp7142aujz-r7-analog+devices-38928114, Output Type=AdjustableProgrammable, RoHS=TRUE, Temperature Range High=+125°C, Temperature Range Low=-40°C
U5: "5V 150mA output, 30V input Fixed Output Linear-Voltage Regulator, SOT23-3", MF="Texas Instruments", MP=TLV70950DBZR
U6: library part REF3040EAIDBZR, "Low-Drift Low-Power Series Voltage Reference 4.096V SOT23-3", MF="Texas Instruments", MP=REF3040EAIDBZR
U7: library part OPA350EA, "High-Speed Single-Supply Rail-to-Rail Op Amp, MicroAmplifier Series, 8VSSOP", MF="Texas Instruments", MP=OPA350EA/2K5
U8: "DAC 8bit 1 channel SPI Supply Reference Buffered Voltage", MF="Texas Instruments", MP=DAC5311IDCKR

## Via types
v1: diameter 0.6, hole 0.3, Top Layer to Bottom Layer, tented both sides, 230 vias
v2: diameter 0.6, hole 0.3, Top Layer to Bottom Layer, 185 vias
v3: diameter 0.8, hole 0.5, Top Layer to Bottom Layer, 126 vias

## Nets (pads, with @x,y where several pads share a name; then routed paths per layer and width w, separated by ;. In a path a pad name is that pad's centre, name@x,y a point inside that pad or via, vN(x,y) a via of type N, cw(c..) or ccw(c..) an arc to the next point about the centre after c; other vN are vias at no path point)
3V3: C9.1 C11.1 J3.2 R4.2 U2.23 U2.24 U3.1 | length 54.8
  Layer 2 w0.3: v1(20.55,44.15) 20.55,47.375 25.525,52.35 45.775,52.35 50.15,47.975 50.15,39.742 47.55,37.142 v1(47.55,36.125)
  Bottom Layer w0.3: R4.2 16.25,43.85 17.154,42.946 19.346,42.946 v1(20.55,44.15)
  other v1: 47,15.65 47,16.525 47.6,35.05
A5V: C5.1 C6.1 C15.1 C16.1 C19.1 C22.2 C25.1 C26.1 TP1.1 U1.7 U4.4 U4.5 U6.1 U7.7 U8.4 | length 3.6
  Top Layer w0.254: U7.7 35.444,41.844 35.444,42.629 35.79,42.975 37.6,42.975 C22.2
  other v1: 38.575,7.175 37.575,7.225 36.625,7.475 34.425,23.7 33.55,23.725 39.175,42.125 40.05,42.125
BIAS: C0.1 J1.2 J1.3 J1.4 J1.5 J2.2 J2.3 J2.4 J2.5 R0.1 | length 47
  Top Layer w0.3: J2.2 12.784,5.46 13.744,4.5 16.256,4.5 17.216,5.46 J2.4 17.54,5.734 18.525,6.719 18.525,7.85 ; J2.3 12.734,10.54 13.719,11.525 16.281,11.525 17.266,10.54 J2.5 17.54,10.266 18.525,9.281 18.525,8 18.675,7.85 C0.1 R0.1 28.15,7.9 28.5,8.25 28.549,8.25 28.725,8.426 28.725,9.5 ; J1.2@26.3,10.3 J1.2 26.784,10.46 27.744,9.5 28.725,9.5 ; J1.3 26.834,15.54 27.769,16.475 30.231,16.475 31.166,15.54 J1.5 31.54,15.266 32.525,14.281 32.525,11.719 31.54,10.734 J1.4 31.216,10.46 30.256,9.5 28.725,9.5
D5V: C7.1 C8.1 C10.1 C12.1 C18.1 K1.1 K2.1 K3.1 K4.1 K5.1 K6.1 R2.2 TP2.1 U1.14 U2.1 U3.8 U5.2 | length 93.6
  Top Layer w0.3: C12.1 48.875,30.4 49.225,30.05 49.5,30.05 50.675,28.875 R2.2
  Layer 2 w1: K5.1 K6.1 K3.1 11.4,39.275 ; K1.1 11.4,39.275 ; v1(47.6,31.2) 45.325,33.475 45.325,37.434 47.55,39.659 47.55,46.25 43.375,50.425 29.2,50.425 18.05,39.275 11.4,39.275
  other v1: 48.875,9.525 48.1,10.225 47.025,21.4 47.025,22.275 43.2,23.975 43.175,24.85 43.175,25.725 47.575,30.275
DDC_CLK: J3.15 U2.16 | length 29.5
  Top Layer w0.2: U2.16 41.071,15.946 41.071,16.742 42.817,18.488 49.397,18.488 52.179,21.27 52.179,26.207 57.215,31.243 58.973,31.243 J3.15
DDC_CONV: J3.19 U2.14 | length 35.2
  Top Layer w0.2: U2.14 39.771,15.946 39.771,16.742 42.425,19.396 49.021,19.396 51.271,21.646 51.271,26.723 51.675,27.127 51.675,30.783 57.269,36.377 59.027,36.377 J3.19
DDC_D\V\A\L\I\D\: J3.20 U3.3 | length 15.5
  Top Layer w0.2: U3.3 45.546,35.154 45.546,34.433 46.883,33.096 53.206,33.096 J3.20
DDC_D\X\M\I\T\: J3.9 U2.18 | length 26.3
  Top Layer w0.2: U2.18 42.371,15.804 42.371,15.008 43.97,13.409 50.466,13.409 54.671,17.614 54.671,21.079 57.269,23.677 59.027,23.677 J3.9
DDC_DCLK: J3.8 U2.17 | length 23
  Top Layer w0.2: U2.17 41.721,15.804 41.721,15.008 43.774,12.955 50.654,12.955 55.125,17.426 55.125,19.775 J3.8
DDC_DOUT: J3.21 U3.2 | length 17.1
  Top Layer w0.2: U3.2 46.196,35.321 46.196,36.846 48.213,38.863 58.973,38.863 J3.21
DDC_RANGE0: J3.14 U2.21 | length 25
  Top Layer w0.2: U2.21 44.321,15.804 44.321,15.008 44.558,14.771 49.902,14.771 53.309,18.178 53.309,25.579 J3.14
DDC_RANGE1: J3.13 U2.20 | length 28.5
  Top Layer w0.2: U2.20 43.671,15.804 43.671,15.008 44.362,14.317 50.09,14.317 53.763,17.99 53.763,25.251 57.269,28.757 59.027,28.757 J3.13
DDC_RANGE2: J3.10 U2.19 | length 22.8
  Top Layer w0.2: U2.19 43.021,15.804 43.021,15.008 44.166,13.863 50.278,13.863 54.217,17.802 54.217,21.407 J3.10
DDC_TEST: J3.16 U2.15 | length 27.7
  Top Layer w0.2: U2.15 40.421,15.946 40.421,16.742 42.621,18.942 49.209,18.942 51.725,21.458 51.725,26.535 J3.16
DIV_1: J3.23 R3.2 | length 49.3
  Bottom Layer w0.2: R3.2 18.225,45.659 25.391,52.825 48.387,52.825 57.215,43.997 58.973,43.997 J3.23
DIV_21: J3.22 R7.2 | length 71.5
  Bottom Layer w0.2: R7.2 18.225,20.4 19.079,21.254 19.079,33.362 19.404,33.687 19.404,41.137 21.658,43.391 21.658,47.808 25.725,51.875 46.015,51.875 J3.22
DIV_201: J3.24 R5.2 | length 58.4
  Bottom Layer w0.2: R5.2 18.225,33.186 18.623,33.585 18.66,33.585 18.95,33.875 18.95,41.325 21.204,43.579 21.204,47.996 25.537,52.329 48.101,52.329 J3.24
GND: C0.2 C00.2 C5.2 C6.2 C7.2 C8.2 C9.2 C10.2 C11.2 C12.2 C13.2 C14.2 C15.2 C16.2 C17.2 C18.2 C19.2 C20.2 C21.2 C22.1 C23.2 C24.2 C25.2 C26.2 C27.2 D1.2 J3.3 J3.4 J3.11 J3.12 J3.17 J3.18 J3.25 J3.26 Q1.2 Q2.2 Q3.2 R6.1 R8.1 RN1.1 RN2.1 U1.13 U1.15 U1.21 U2.2 U2.11 U2.12 U2.13 U2.22 U3.4 U3.5 U4.2 U5.1 U6.3 U7.4 U8.5 | length 29
  Top Layer w0.5: v1(22.525,34.375) 22.918,34.768 22.918,35.493 RN1.1 ; C6.2 35.65,22.65 35.9,22.4 C5.2 ; C22.1 38.95,44.35 39.725,43.575 39.775,43.525 U6.3 ; v1(38.225,21.9) 38.252,21.9 38.299,21.947 39.025,21.947 39.05,21.922 U2.12 U2.11@39.589,21.675 ; U2.12@39.075,21.9 U2.11@39.614,21.9 ; U4.2 v1(41.75,7.175) ; U1.13 40.985,26 41.451,26.466 41.451,26.479 41.776,26.804 44.146,26.804 C8.2 44.325,26.675 46.375,26.675 C7.2 ; U1.15 42.255,35.4 42.305,35.45 42.923,35.45 43.123,35.65 v1(43.15,35.65) ; v1(46.675,17.825) 46.702,17.825 46.952,17.575 C9.2 49.45,17.575 v1(52.65,20.775) ; C11.2 51.982,34 52.307,34.325 v1(52.325,34.325)
  other v1: 23.05,3.7 19.975,3.775 25.925,3.8 57.85,4.125 63.625,4.225 66.75,4.425 9.2,4.75 5.825,4.825 69.375,5.625 23.1,6.075 63.45,6.1 20.425,6.175 53.425,6.775 57.8,6.9 50.2,7 66.8,7.4 59.65,8.475 4.25,8.675 20.675,9.175 22.725,9.3 45.375,9.625 69.5,10.15 65.375,10.275 54.1,10.35 46.55,10.825 20.575,10.85 59.85,10.85 22.6,10.875 43.375,11.3 56.55,12.5 58.25,12.6 16.475,12.7 13.175,12.825 20.6,12.875 42.5,12.875 67.325,12.95 18.1,13.9 4.375,13.925 41.575,13.95 15.075,14 12.375,14.25 20.525,14.6 70.05,14.975 35.925,15.5 66.55,16.175 20.625,16.2 37.7,16.55 45.725,17.4 29.05,17.45 42.85,17.45 35.9,17.475 32.325,17.625 26.65,17.675 20.675,17.8 4.375,18.6 39.375,18.65 37,18.9 68.85,19.075 20.725,19.425 41.45,19.85 47.05,20.075 66.45,20.575 20.7,20.975 13.75,21.5 70.35,22.05 10.236,22.056 38.075,22.75 48.925,23.05 20.6,23.15 4.625,23.325 10.275,23.65 54.9,23.9 67.65,23.9 14.225,24.425 21.425,25.075 15.225,25.575 16.275,26.65 66.4,26.7 23.15,26.8 69.975,27.075 40.225,27.35 36.1,27.4 38.15,27.45 4.475,28.25 28.45,28.35 30.225,28.35 31.95,28.375 24.25,28.55 39.95,28.6 25.8,28.725 52.375,28.9 36.1,29.175 38.15,29.25 67.675,29.45 28.35,29.8 43.844,29.929 30.125,29.95 31.95,30.025 13.65,30.125 12.775,30.725 25.9,30.85 42.925,31.225 53.725,31.35 36.375,31.5 28.4,31.725 30.15,31.775 69.825,31.95 32.075,31.975 12.7,32.15 66.625,32.2 4.525,32.35 21.05,33.15 55.725,33.65 12.775,33.925 68.125,34.325 20.425,34.375 44,34.5 43.175,34.725 44,35.425 53.75,35.55 66.3,35.925 52.125,35.975 50.55,36.2 70.05,36.2 13.375,36.7 43.05,37.325 4.475,37.45 49.375,37.55 54.225,37.575 51.625,37.6 12.6,37.65 14.28,37.686 41.15,38.175 35.1,38.25 43.8,38.4 45.475,39.075 42.175,39.275 37.425,39.3 67.85,39.425 44.225,40.175 12.75,40.425 13.7,40.425 51.475,40.7 49.2,40.75 45.85,40.825 25.15,41.175 23.325,41.45 53.875,41.65 69.95,41.65 66.15,41.725 4.425,42.425 26.25,42.625 32.65,42.675 13.825,42.725 49.075,42.9 29.525,43.15 24.85,43.25 32.825,44.125 55,44.175 67.9,44.275 15.15,44.3 51.3,44.4 26.65,44.425 28.1,45.15 30.35,45.2 49.125,45.25 45.95,45.625 22.475,45.875 5.35,45.95 53.1,46.225 70.05,46.35 66.1,46.375 44.175,46.45 28.2,46.825 30.4,46.85 32.8,47.075 48.625,47.375 55.5,47.475 51.675,47.55 61.05,47.775 68.2,48.55 30.2,49 47.225,49 8.225,49.15 32.25,49.15 24.225,49.325 4.475,49.6 20.55,50 59.425,50.025 67.2,50.175 70.55,50.175 63.725,50.35 45.325,50.425 28.125,51.075 58.225,52 51.375,52.1 68.3,52.15 6.625,52.225 10.95,52.225 15,52.4 19.275,52.425 21.875,52.425
  other v3: 1,1 3,1 5,1 7,1 9,1 11,1 13,1 15,1 17,1 19,1 21,1 23,1 25,1 27,1 29,1 31,1 33,1 35,1 37,1 39,1 41,1 43,1 45,1 47,1 49,1 51,1 53,1 55,1 57,1 59,1 61,1 63,1 65,1 67,1 69,1 71,1 73,1 1,3 73,3 1,5 73,5 1,7 73,7 1,9 73,9 1,11 73,11 1,13 73,13 1,15 73,15 1,17 73,17 1,19 73,19 1,21 73,21 1,23 73,23 1,25 73,25 1,27 73,27 1,29 73,29 1,31 73,31 1,33 73,33 1,35 73,35 1,37 73,37 1,39 73,39 1,41 73,41 1,43 73,43 1,45 73,45 1,47 73,47 1,49 73,49 1,51 73,51 1,53 73,53 1,55 3,55 5,55 7,55 9,55 11,55 13,55 15,55 17,55 19,55 21,55 23,55 25,55 27,55 29,55 31,55 33,55 35,55 37,55 39,55 41,55 43,55 45,55 47,55 49,55 51,55 53,55 55,55 57,55 59,55 61,55 63,55 65,55 67,55 69,55 71,55 73,55
GUARD: U1.2 U1.27 | length 20.4
  Top Layer w0.2: v2(20.45,31.45) 19.775,30.775 19.5,30.775 18.775,31.5 18.775,34.8 19.546,35.571 21.492,35.571 21.729,35.808 21.729,36.35 21.729,36.892 21.492,37.129 21.267,37.129 20.95,37.446 v2(20.95,37.475)
  Top Layer w0.3: U1.2 U1.27
  other v2: 15.075,6.175 14.275,6.225 15.825,6.425 16.525,7.125 9.975,7.15 10.975,7.15 13.375,7.225 11.8,7.25 9.125,7.45 16.9,7.925 8.475,8.05 7.875,8.7 11.475,8.8 13.375,8.8 16.6,8.85 10.375,8.9 7.4,9.45 14.15,9.55 15.85,9.575 9.625,9.625 14.975,9.775 9.125,10.325 7.375,10.4 28.975,11.125 9.075,11.2 7.35,11.325 29.775,11.35 28.175,11.45 9.075,12.025 30.55,12.15 25.55,12.175 27.375,12.225 7.375,12.25 24.45,12.25 23.8,12.85 9.075,12.875 30.95,12.95 7.375,13.2 23.2,13.475 9.075,13.75 25.65,13.8 27.325,13.825 30.65,13.825 7.375,14.125 22.7,14.2 24.85,14.4 28.125,14.55 9.075,14.625 29.775,14.675 28.85,15 7.375,15.025 22.7,15.15 24.55,15.25 9.1,15.475 7.375,15.95 22.725,16.15 24.5,16.225 9.075,16.3 7.375,16.85 9.075,17.025 22.775,17.1 24.525,17.15 7.375,17.75 9.075,17.8 22.775,17.95 24.525,18.025 9.475,18.475 7.375,18.6 10.3,18.75 22.75,18.85 24.55,18.95 7.375,19.5 22.725,19.8 24.55,19.825 7.35,20.45 10.275,20.475 22.75,20.65 24.55,20.7 9.45,20.95 7.375,21.425 24.575,21.575 22.75,21.6 9.075,21.8 7.425,22.35 24.975,22.4 22.75,22.525 9.05,22.625 25.725,22.95 7.4,23.225 23.125,23.425 9.05,23.5 26.45,23.525 7.375,24.1 23.75,24.125 9.125,24.275 15.925,24.4 18.35,24.425 24.425,24.8 7.35,24.975 9.55,24.975 10.325,25.05 16.775,25.25 24.75,25.65 19.775,25.725 7.375,25.8 17.625,26.1 20.375,26.4 7.375,26.725 10.3,26.775 18.3,26.825 20.975,27.05 9.475,27.2 7.375,27.625 21.425,27.825 9.1,27.975 7.4,28.5 21.45,28.7 19.85,28.725 9.125,28.75 7.375,29.4 9.075,29.575 19.85,29.625 21.45,29.675 7.425,30.275 9.1,30.4 19.875,30.575 22.45,30.7 7.425,31.15 9.1,31.25 21.85,31.55 24.6,31.675 7.4,32 9.1,32.1 25.2,32.325 22.925,32.6 7.4,32.875 9.1,32.95 25.85,33 23.575,33.25 7.375,33.775 9.1,33.775 24.25,33.925 9.075,34.55 7.375,34.675 24.825,34.7 9.075,35.35 7.375,35.625 9.05,36.2 26.45,36.375 7.4,36.525 25.775,36.925 15.75,36.95 9.075,37.05 7.375,37.35 25.075,37.5 16.5,37.55 18.2,37.625 20.075,37.7 9.05,37.85 24.325,37.85 22.725,38.175 17.35,38.2 7.375,38.225 9.05,38.675 22.05,38.825 7.375,39.05 21.175,39.325 20.175,39.35 9.075,39.55 7.375,39.9 15.6,40.375 9.05,40.4 7.375,40.675 9.025,41.25 7.375,41.475 9.35,42.125 7.4,42.375 10.05,42.75 7.75,43.175 8.425,43.825 9.1,44.45 9.675,45.075 10.3,45.725
NetC00_1: C00.1 R0.2 TP3.1 U8.6 | length 19.5
  Top Layer w0.3: R0.2 28.425,6.425 29.85,6.425 C00.1 ; C00.1@30.125,6.2 30.35,6.425 31.411,6.425 31.586,6.6 TP3.1 34.1,4.275 37.808,4.275 39.519,5.986 39.519,8.403 41.617,10.5 U8.6
NetC1_1: C1.1 U1.5 | length 2.8
  Top Layer w0.3: U1.5 30.825,22.575 C1.1@30.85,22.55
NetC1_2: C1.2 U1.6 | length 6.8
  Top Layer w0.3: C1.2 31.35,19.45 31.75,19.85 31.75,20.825 32.4,21.475 32.4,23.2 32.095,23.505 U1.6
NetC2_1: C2.1 U1.4 | length 6.5
  Top Layer w0.3: C2.1@28.25,19.45 28.5,19.45 28.9,19.85 28.9,20.8 29.516,21.416 29.516,25.261 U1.4
NetC2_2: C2.2 U1.3 | length 2.8
  Top Layer w0.3: C2.2@28.25,22.55 28.285,22.585 U1.3
NetC3_1: C3.1 U1.24 | length 2.8
  Top Layer w0.3: U1.24 30.825,37.325 C3.1
NetC3_2: C3.2 U1.23 | length 6.9
  Top Layer w0.3: C3.2 31.4,40.55 31.8,40.15 31.8,39.225 32.425,38.6 32.425,36.64 32.095,36.31 U1.23
NetC4_1: C4.1 U1.25 | length 6.5
  Top Layer w0.3: C4.1@28.25,40.55 28.5,40.55 28.9,40.15 28.9,39.275 29.5,38.675 29.5,34.755 U1.25
NetC4_2: C4.2 U1.26 | length 2.8
  Top Layer w0.3: C4.2@28.25,37.45 28.25,34.735 U1.26
NetC20_1: C20.1 C21.1 R1.1 U7.3 | length 7.2
  Top Layer w0.254: U7.3 34.725,47.05 35.875,48.2 C21.1
  Top Layer w0.3: C21.1 38.3,48.2 C20.1 38.375,48.125 R1.1
NetJ1_1: J1.1 U1.1 | length 17.7
  Top Layer w0.3: U1.1 25.775,24.6 23.65,22.475 23.65,14.35 25,13 J1.1
NetJ2_1: J2.1 K1.3 K3.3 K5.3 | length 66.6
  Top Layer w0.3: J2.1 10,8 8.25,9.75 8.25,19.525 ; K5.3 12.31,19.525 8.25,19.525 ; K3.3 12.285,25.85 8.25,25.85 ; K1.3 12.21,44.75 10.75,44.75 8.25,42.25 8.25,25.85 ; 8.25,19.525 8.25,25.85
NetK1_2: K1.2 K2.2 Q1.3 | length 7.5
  Bottom Layer w0.3: Q1.3 Q1.3@11.575,44.75 ; K2.2 11.75,42.845 11.75,44.575 11.662,44.662 Q1.3@11.575,44.75 ; K1.2 11.75,46.83 11.75,44.925 Q1.3@11.575,44.75
NetK1_4: K1.4 K2.4 | length 6.3
  Top Layer w0.3: K2.4 K1.4
NetK2_3: K2.3 RN1.3 RN2.2 U1.28 | length 18.2
  Top Layer w0.3: K2.3 18.61,38.525 21.1,38.525 22.375,37.25 22.875,37.25 RN1.3@23.099,37.026 ; RN1.3 23.25,36.875 24.5,36.875 25.625,35.75 25.625,34.15 25.775,34 25.625,33.85 25.5,33.85 23.704,32.054 23.704,31.725 23.554,31.575 RN2.2
NetK3_2: K3.2 K4.2 Q2.3 | length 7.5
  Bottom Layer w0.3: Q2.3 Q2.3@11.575,32.3 ; K3.2 11.75,30.195 11.75,32.125 11.662,32.212 Q2.3@11.575,32.3 ; K4.2 11.75,34.18 11.75,32.475 Q2.3@11.575,32.3
NetK3_4: K3.4 K4.4 | length 6.3
  Top Layer w0.3: K3.4 K4.4
NetK4_3: K4.3 RN1.2 | length 5.9
  Top Layer w0.3: K4.3 16.86,36.75 19.749,36.75 19.925,36.574 19.925,36.55 20.125,36.35 RN1.2
NetK5_2: K5.2 K6.2 Q3.3 | length 7.6
  Bottom Layer w0.3: Q3.3 11.75,19.5 11.75,17.545 K5.2 ; Q3.3@11.725,19.5 11.725,21.505 K6.2
NetK5_4: K5.4 K6.4 | length 6.3
  Top Layer w0.3: K5.4 K6.4
NetK6_3: K6.3 RN2.3 | length 10.4
  Top Layer w0.3: K6.3 20.675,27.915 20.675,30.45 20.825,30.6 RN2.3
NetQ1_1: Q1.1 R3.1 R4.1 | length 5
  Bottom Layer w0.3: Q1.1 14.075,45.625 16.225,45.625 R4.1 16.25,45.55 17.5,44.3 17.875,44.3 18.225,43.95 R3.1
NetQ2_1: Q2.1 R5.1 R6.2 | length 4.9
  Bottom Layer w0.3: Q2.1 14.075,33.175 16.225,33.175 R6.2 ; R6.2@16.25,33.1 17.5,31.85 17.875,31.85 18.225,31.5 R5.1
NetQ3_1: Q3.1 R7.1 R8.2 | length 4.9
  Bottom Layer w0.3: Q3.1 14.075,20.375 16.225,20.375 R8.2 ; R8.2@16.25,20.3 17.5,19.05 17.875,19.05 18.225,18.7 R7.1
NetR1_2: R1.2 U6.2 | length 2.8
  Top Layer w0.3: R1.2 40.6,46.375 41.75,45.225 41.75,44.625 41.9,44.475 U6.2
NetR2_1: R2.1 U1.16 U3.7 | length 11.7
  Top Layer w0.2: U1.16 40.985,34 42.456,32.529 45.184,32.529 46.029,31.684 46.029,30.946 U3.7 46.196,30.779 46.196,30.033 47.079,29.15 48.75,29.15 R2.1
NetU1_8: U1.8 U2.9 | length 10.8
  Top Layer w0.2: U1.8 34.635,24.6 34.835,24.4 34.95,24.4 35.525,23.825 36.038,23.825 36.952,22.911 36.952,21.531 38.366,20.117 40.23,20.117 40.238,20.117 40.929,20.808 40.929,21.604 U2.9
NetU1_9: U1.9 U2.10 | length 8.5
  Top Layer w0.2: U1.9 35.905,24.6 37.406,23.099 37.406,21.719 38.554,20.571 40.042,20.571 40.279,20.808 40.279,21.604 U2.10
NetU1_10: U1.10 U2.8 | length 6.9
  Top Layer w0.2: U1.10 37.175,24.6 37.975,23.8 38.603,23.8 39.386,23.017 41.104,23.017 41.579,22.542 41.579,21.746 U2.8
NetU1_11: U1.11 U2.7 | length 6.2
  Top Layer w0.2: U1.11 38.445,24.6 39.574,23.471 41.3,23.471 42.229,22.542 42.229,21.746 U2.7
NetU1_12: U1.12 U2.6 | length 5.6
  Top Layer w0.2: U1.12 39.715,24.6 39.915,24.4 39.917,24.4 40.371,23.946 41.475,23.946 42.879,22.542 42.879,21.746 U2.6
NetU1_17: U1.17 U3.6 | length 8.2
  Top Layer w0.2: U1.17 39.715,34 41.64,32.075 44.996,32.075 45.404,31.667 45.404,30.896 U3.6
NetU1_18: U1.18 U2.3 | length 22.3
  Top Layer w0.2: U1.18 38.445,34 43.766,28.679 47.501,28.679 48.583,27.597 48.583,23.874 47.726,23.017 45.438,23.017 44.971,22.55 44.971,21.746 U2.3
NetU1_19: U1.19 U2.4 | length 23.1
  Top Layer w0.2: U1.19 37.175,34 42.95,28.225 47.313,28.225 48.129,27.409 48.129,24.062 47.538,23.471 45.25,23.471 44.321,22.542 44.321,21.746 U2.4
NetU1_20: U1.20 U2.5 | length 23.9
  Top Layer w0.2: U1.20 35.905,34 42.155,27.75 47.146,27.75 47.675,27.221 47.675,24.25 47.35,23.925 45.054,23.925 43.671,22.542 43.671,21.746 U2.5
PWR_10V: F1.2 J3.1 | length 5.8
  Top Layer w1: J3.1 62.456,12.574 62.456,10.009 F1.2
SPI_CS: J3.5 U8.1 | length 20.2
  Top Layer w0.2: U8.1 44.621,10.596 45.228,10.596 46.225,11.593 51.218,11.593 56.487,16.862 56.487,17.815 57.215,18.543 58.973,18.543 J3.5
SPI_MOSI: J3.7 U8.3 | length 21.4
  Top Layer w0.2: U8.3 44.775,11.8 45.476,12.501 50.842,12.501 55.579,17.238 55.579,19.447 57.215,21.083 58.245,21.083 58.973,21.083 J3.7
SPI_SCLK: J3.6 U8.2 | length 17.4
  Top Layer w0.2: U8.2 44.621,11.246 45.096,11.246 45.897,12.047 51.03,12.047 56.033,17.05 56.033,18.143 J3.6
VIN: C13.1 C14.1 C17.1 C27.1 D1.1 F1.1 U4.1 U4.3 U5.3 | length 29.9
  Top Layer w0.75: U4.1 C14.1@42.4,6.225 ; U4.3 42.4,8.125 42.6,8.325 C13.1
  Top Layer w1: C13.1 42.675,8.3 42.675,8.15 42.835,7.99 42.835,6.185 C14.1 42.675,5.875 42.675,5.057 43.261,4.471 45.421,4.471 46.15,5.2 C17.1 46.15,6.05 46.2,6.05 46.775,5.475 47.739,5.475 48.914,6.65 U5.3 49.9,5.7 D1.1 ; C27.1 54.85,8.625 55.325,8.15 D1.1@55.325,6 ; C27.1@55.05,8.675 56.92,8.675 57.31,9.065 F1.1
VREF: C23.1 C24.1 TP4.1 U1.22 U7.2 U7.6 | length 15.7
  Top Layer w0.254: C23.1 34.175,39.675 34.725,40.225 34.725,40.681 ; U7.2 35.4,43.875 34.725,43.2 U7.6 34.725,40.681 ; TP4.1@37.844,40.681 34.725,40.681
  Top Layer w0.3: U1.22 33.365,35.4 33.515,35.55 33.525,35.55 33.9,35.925 33.9,36.925 C24.1 33.925,37.55 33.925,39.275 C23.1
pads on no net: U7.1 U7.5 U7.8

## Polygon pours and split planes (outlines as drawn)
GND on Top Layer "GND_L01_P01" (solid, remove dead copper, pour order 91): 0,56 74,56 74,0 0,0
3V3 on Top Layer "3V3_L01_P002" (solid, pour order 64): 48.65,36.05 48.65,35.275 48.025,34.65 46.925,34.65 46.575,35 46.575,35.95 47.075,36.45 48.25,36.45
D5V on Top Layer "D5V_L01_P01" (solid, pour order 69): 47.925,31.5 48.775,30.65 48.775,30.35 48.35,29.925 47.15,29.925 46.775,30.3 46.775,31.35 46.925,31.5
D5V on Top Layer "D5V_L01_P04" (solid, pour order 67): 49.89,10.1 50.975,10.1 51.25,10.375 51.25,10.875 51.025,11.1 48.54,11.1 47.725,10.285 47.725,8.725 47.925,8.525 48.315,8.525
GUARD on Top Layer "GUARD_L01_P02" (solid, pour order 76): 22.07,36.978 21.815,36.978 21.45,36.613 21.45,35.55 21.225,35.325 19.675,35.325 19.125,35.875 17.75,35.875 16.125,34.25 14.75,34.25 14.25,34.75 14.25,36 16.5,38.25 16.5,38.75 14.25,41 14.25,42.25 14.75,42.75 15.75,42.75 18.75,39.75 21.75,39.75 23.25,38.25 25.5,38.25 26.25,39 26.25,41 27.25,42 32,42 33.15,40.85 33.15,33.65 32.5,33 26.5,33 24,30.5 22.75,30.5 21.75,29.5 21.75,27.25 16,21.5 15,21.5 14.25,22.25 14.25,23.25 19.5,28.5 19.5,31 20.25,31.75 21.5,31.75 24.5,34.75 24.5,35.75 23.272,36.978
GUARD on Top Layer "GUARD_L01_P06" (solid, pour order 80): 32.5,27 33.15,26.35 33.15,19.3 32.1,18.25 27.025,18.25 26.25,19.025 26.25,21.75 25.75,22.25 25.5,22.25 25,21.75 25,15.75 26.5,14.25 27.75,15.5 30.25,15.5 31.5,14.25 31.5,11.75 30.25,10.5 27.75,10.5 26.5,11.75 24.25,11.75 22.25,13.75 22.25,23.75 25.5,27
GUARD on Top Layer "GUARD_L01_P05" (solid, pour order 79): 16.682,22.682 16.25,22.25 16.682,21.818 16.682,20.682 16.682,17.682 16.25,17.25 16.682,16.818 16.682,15.568 17.25,15 18.5,15 19.25,15.75 19.25,23.25 18.25,24.25 17.75,24.25 16.682,23.182
GUARD on Top Layer "GUARD_L01_P04" (solid, pour order 78): 15.96,34.79 16.682,34.068 16.682,31.132 15.9,30.35 16.5,29.75 16.5,28.75 17.25,28 19.25,28 19.975,28.725 19.975,30.6 19.25,31.325 19.25,34.9 19.932,35.582 19.515,36 17.171,36
GUARD on Top Layer "GUARD_L01_P03" (solid, pour order 77): 16.682,42.932 16,42.25 17,41.25 18.5,39.75 19.5,39.75 19.5,48.5 18.5,49.5 17,49.5 15.75,49.5 15.75,47.25 16.682,46.318
GUARD on Top Layer "GUARD_L01_P01" (solid, pour order 74): 13.75,10.5 16.25,10.5 17.5,9.25 17.5,6.75 16.25,5.5 13.75,5.5 12.5,6.75 9,6.75 7,8.75 7,43 10.25,46.25 11.5,46.25 14.75,49.5 16,49.5 17,48.5 17,47.5 13,43.5 11.5,43.5 9.5,41.5 9.5,28 10.25,27.25 11.75,27.25 15,30.5 16,30.5 16.75,29.75 16.75,28.5 12.75,24.5 10,24.5 9.5,24 9.5,21.75 10.25,21 12.75,21 16.75,17 16.75,15.75 16,15 14.75,15 11.5,18.25 10.25,18.25 9.5,17.5 9.5,10.5 10.75,9.25 12.5,9.25
A5V on Top Layer "A5V_L01_P02" (solid, pour order 81): 33.35,21.225 33.35,23.15 33.075,23.425 33.075,24.725 33.35,25 33.6,25 34.75,23.85 34.75,21.225 34.475,20.95 33.625,20.95
D5V on Top Layer "D5V_L01_P02" (solid, pour order 65): 46.85,25.225 46.85,24.725 46.575,24.45 44.375,24.45 43.55,23.625 43,23.625 42.025,24.6 42.025,25.825 42.35,26.15 43.5,26.15 44.225,25.425 46.65,25.425
A5V on Top Layer "A5V_L01_P03" (solid, pour order 73): 35.736,42.236 36.15,42.65 37.925,42.65 38.875,41.7 43.575,41.7 44.175,42.3 44.175,42.85 44.025,43 39.3,43 38.775,43.525 35.775,43.525 35.175,42.925 35.175,42.475 35.414,42.236
A5V on Top Layer "A5V_L01_P01" (solid, pour order 72): 40.35,13.975 42.325,12 39.175,8.85 39.175,6.775 38.45,6.05 36.525,6.05 36.125,6.45 36.125,8.875 37.825,10.575 39.325,10.575 39.8,11.05 39.8,13.65 40.125,13.975
3V3 on Top Layer "3V3_L01_P01" (solid, pour order 68): 47.45,16.875 48.3,16.025 48.3,15.4 48.125,15.225 45.7,15.225 45.55,15.375 45.55,16.45 45.975,16.875
D5V on Top Layer "D5V_L01_P03" (solid, pour order 66): 46.6,22.625 48.025,22.625 48.4,22.25 48.4,21.925 47.525,21.05 46.375,21.05 46.15,21.275 46.15,22.175
GND on Layer 2 "GND_L03_P01" (solid, remove dead copper, pour order 93): 0,56 74,56 74,0 0,0
D5V on Layer 2 "D5V_L03_P01" (solid, pour order 71): 43.075,26.075 46.925,29.925 46.925,31.375 47.2,31.65 47.8,31.65 48.075,31.375 48.075,28.95 45.15,26.025 45.15,24.775 47.55,22.375 47.55,21.075 44.975,18.5 44.975,15.25 49.05,11.175 49.425,11.175 49.675,10.925 49.675,9.85 49.025,9.2 48.65,9.2 47.775,10.075 47.775,10.6 43.5,14.875 43.5,19.4 45.225,21.125 45.225,21.95 43.75,23.425 43,23.425 42.775,23.65 42.775,25.825 43.025,26.075
3V3 on Layer 2 "3V3_L03_P01" (solid, pour order 70): 51.25,33.125 47.925,36.45 47.25,36.45 47.075,36.275 47.075,35.05 49.525,32.6 49.525,19.7 46.525,16.7 46.525,15.65 48.425,13.75 58.375,13.75 58.775,14.15 58.775,15.075 58.075,15.775 56.475,15.775 51.25,21
GUARD on Layer 2 "GUARD_L03_P02" (solid, pour order 90): 16.25,10.5 13.75,10.5 12.5,9.25 12.5,6.75 13.75,5.5 16.25,5.5 17.5,6.75 17.5,9.25
GUARD on Layer 2 "GUARD_L03_P01" (solid, pour order 87): 27.75,15.5 30.25,15.5 31.5,14.25 31.5,11.75 30.25,10.5 27.75,10.5 26.5,11.75 26.5,14.25
A5V on Layer 2 "A5V_L03_P01" (solid, pour order 75): 40.175,42.5 40.375,42.3 40.375,37.6 35,32.225 35,14.5 39.225,10.275 39.225,7.05 38.45,6.275 37.05,6.275 33.2,10.125 33.2,33.575 38.825,39.2 38.825,42.275 39.05,42.5
no net on Top Solder "NONET_L-01_P-001" (solid): 0,30 0,0 74,0 74,56 0,56 0,30 2,30 2,4 4,2 70,2 72,4 72,52 70,54 4,54 2,52 2,30
no net on Top Solder "GUARD_LTS_P01" (solid): 21.225,35.325 21.45,35.55 21.45,36.613 21.815,36.978 22.07,36.978 23.272,36.978 24.5,35.75 24.5,34.75 21.5,31.75 20.25,31.75 19.5,31 19.5,28.5 14.25,23.25 14.25,22.25 15,21.5 16,21.5 21.75,27.25 21.75,29.5 22.75,30.5 24,30.5 26.5,33 32.5,33 33.15,33.65 33.15,40.85 32,42 27.25,42 26.25,41 26.25,39 25.5,38.25 23.25,38.25 21.75,39.75 18.75,39.75 15.75,42.75 14.75,42.75 14.25,42.25 14.25,41 16.5,38.75 16.5,38.25 14.25,36 14.25,34.75 14.75,34.25 16.125,34.25 17.75,35.875 19.125,35.875 19.675,35.325
no net on Top Solder "GUARD_LTS_P03" (solid): 25.5,27 22.25,23.75 22.25,13.75 24.25,11.75 26.5,11.75 27.75,10.5 30.25,10.5 31.5,11.75 31.5,14.25 30.25,15.5 27.75,15.5 26.5,14.25 25,15.75 25,21.75 25.5,22.25 25.75,22.25 26.25,21.75 26.25,19.025 27.025,18.25 32.1,18.25 33.15,19.3 33.15,26.35 32.5,27
no net on Top Solder "GUARD_LTS_P02" (solid): 13.75,10.5 16.25,10.5 17.5,9.25 17.5,6.75 16.25,5.5 13.75,5.5 12.5,6.75 9,6.75 7,8.75 7,43 10.25,46.25 11.5,46.25 14.75,49.5 16,49.5 17,48.5 17,47.5 13,43.5 11.5,43.5 9.5,41.5 9.5,28 10.25,27.25 11.75,27.25 15,30.5 16,30.5 16.75,29.75 16.75,28.5 12.75,24.5 10,24.5 9.5,24 9.5,21.75 10.25,21 12.75,21 16.75,17 16.75,15.75 16,15 14.75,15 11.5,18.25 10.25,18.25 9.5,17.5 9.5,10.5 10.75,9.25 12.5,9.25
GND on Layer 1 "GND_L02_P01" (solid, remove dead copper, pour order 92): 0,56 74,56 74,0 0,0
GUARD on Layer 1 "GUARD_L02_P03" (solid, pour order 85): 16.682,31.132 16.05,30.5 15,30.5 13.663,29.163 13.663,27.587 14.75,26.5 17.397,29.147 17.397,30.417
GUARD on Layer 1 "GUARD_L02_P02" (solid, pour order 84): 19.5,48.5 18.5,49.5 18.026,49.5 13,44.474 13,43.5 16.25,46.75 18.75,46.75 19.5,47.5
GUARD on Layer 1 "GUARD_L02_P01" (solid, pour order 82): 19.5,39.75 21.75,39.75 22.275,39.225 22.275,37.438 21.45,36.613 21.45,35.55 21.225,35.325 19.675,35.325 19.25,34.9 19.25,31.325 19.537,31.037 20.25,31.75 21.5,31.75 21.75,31.75 21.75,27.25 18.5,24 19.25,23.25 19.25,15.75 18.5,15 17.25,15 16.682,15.568 16.568,15.568 16,15 14.75,15 11.5,18.25 10.25,18.25 9.5,17.5 9.5,10.5 10.75,9.25 12.5,9.25 13.75,10.5 16.25,10.5 17.5,9.25 17.5,6.75 16.25,5.5 13.75,5.5 12.5,6.75 9,6.75 7,8.75 7,43 10.25,46.25 11.5,46.25 14.75,49.5 18.5,49.5 19.5,48.5
GUARD on Layer 1 "GUARD_L02_P05" (solid, pour order 83): 22.75,30.5 21.4,29.15 21.4,31.65 24.5,34.75 24.5,35.75 23.25,37 21.815,36.978 21.45,36.613 21.45,39.75 21.75,39.75 21.979,39.521 23.25,38.25 25.5,38.25 26.25,39 26.25,41 27.25,42 32,42 33.15,40.85 33.15,33.65 32.5,33 26.5,33 24,30.5
GUARD on Layer 1 "GUARD_L02_P04" (solid, pour order 86): 25.5,27 32.5,27 33.15,26.35 33.15,19.3 32.1,18.25 27.025,18.25 26.25,19.025 26.25,21.75 25.75,22.25 25.5,22.25 25,21.75 25,15.75 26.5,14.25 27.75,15.5 30.25,15.5 31.5,14.25 31.5,11.75 30.25,10.5 27.75,10.5 26.5,11.75 24.25,11.75 22.25,13.75 22.25,23.75
GND on Bottom Layer "GND_L04_P01" (solid, remove dead copper, pour order 94): 0,56 74,56 74,0 0,0
GUARD on Bottom Layer "GUARD_L04_P02" (solid, pour order 89): 16.25,10.5 13.75,10.5 12.5,9.25 12.5,6.75 13.75,5.5 16.25,5.5 17.5,6.75 17.5,9.25
GUARD on Bottom Layer "GUARD_L04_P01" (solid, pour order 88): 27.75,15.5 30.25,15.5 31.5,14.25 31.5,11.75 30.25,10.5 27.75,10.5 26.5,11.75 26.5,14.25
no net on Bottom Solder "NONET_L-01_P-001" (solid): 0,30 0,0 74,0 74,56 0,56 0,30 2,30 2,4 4,2 70,2 72,4 72,52 70,54 4,54 2,52 2,30
no net on Bottom Solder "GUARD_LBS_P02" (solid): 16.25,10.5 13.75,10.5 12.5,9.25 12.5,6.75 13.75,5.5 16.25,5.5 17.5,6.75 17.5,9.25
no net on Bottom Solder "GUARD_LBS_P01" (solid): 30.25,15.5 27.75,15.5 26.5,14.25 26.5,11.75 27.75,10.5 30.25,10.5 31.5,11.75 31.5,14.25

## Silkscreen, mask and mechanical layers (free items; w line width, h text height)
Top Overlay:
  drawing of 5 lines, arcs and shapes, not listed
  text "ALTAIR DDC112 Test Board" at 29.454,50.954 h2
  text "UVic, P.D.B., v26.1b" at 46.8,48.586 h1.5
  text "GND" at 52.92,44.904 h1
  text "GND" at 62.572,44.904 h1
  text "DV1" at 62.572,42.364 h1
  text "DV201" at 51.4,42.3 h1
  text "DV21" at 52.412,39.824 h1
  text "10V" at 62.572,39.824 h1
  text "VLD" at 52.92,37.284 h1
  text "CONV" at 62.572,37.284 h1
  text "GND" at 52.92,34.744 h1
  text "GND" at 62.572,34.744 h1
  text "CLK" at 62.572,32.204 h1
  text "TST" at 52.9,32 h1
  text "RNG1" at 62.572,29.664 h1
  text "RNG0" at 52,29.6 h1
  text "GND" at 52.92,27.124 h1